# EAGLE board SparkFun RTK Express-Panel (EAGLE 9.6.2), part 1 of 3
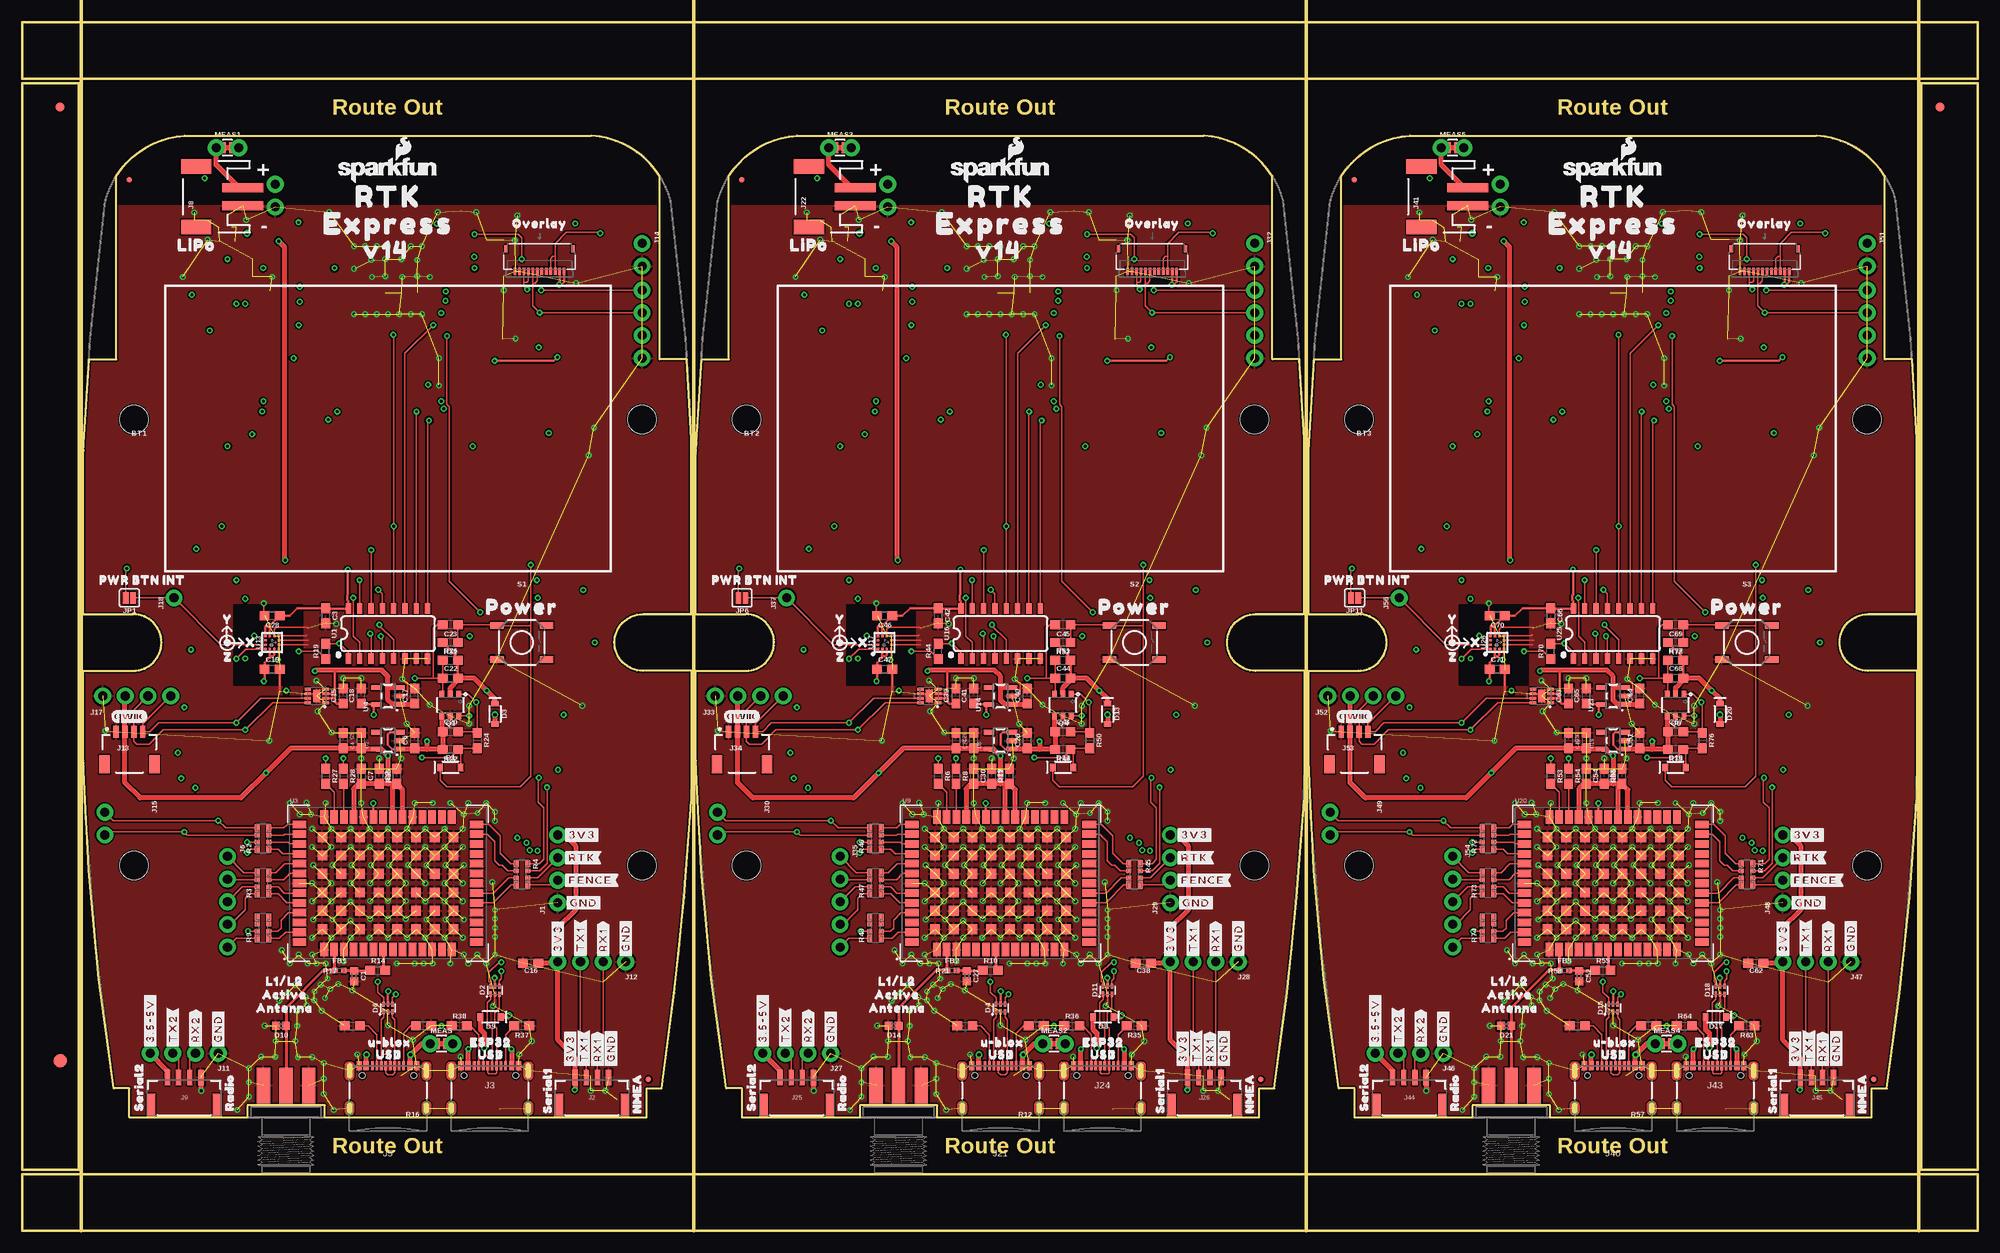
[diagram p0: board, top side]
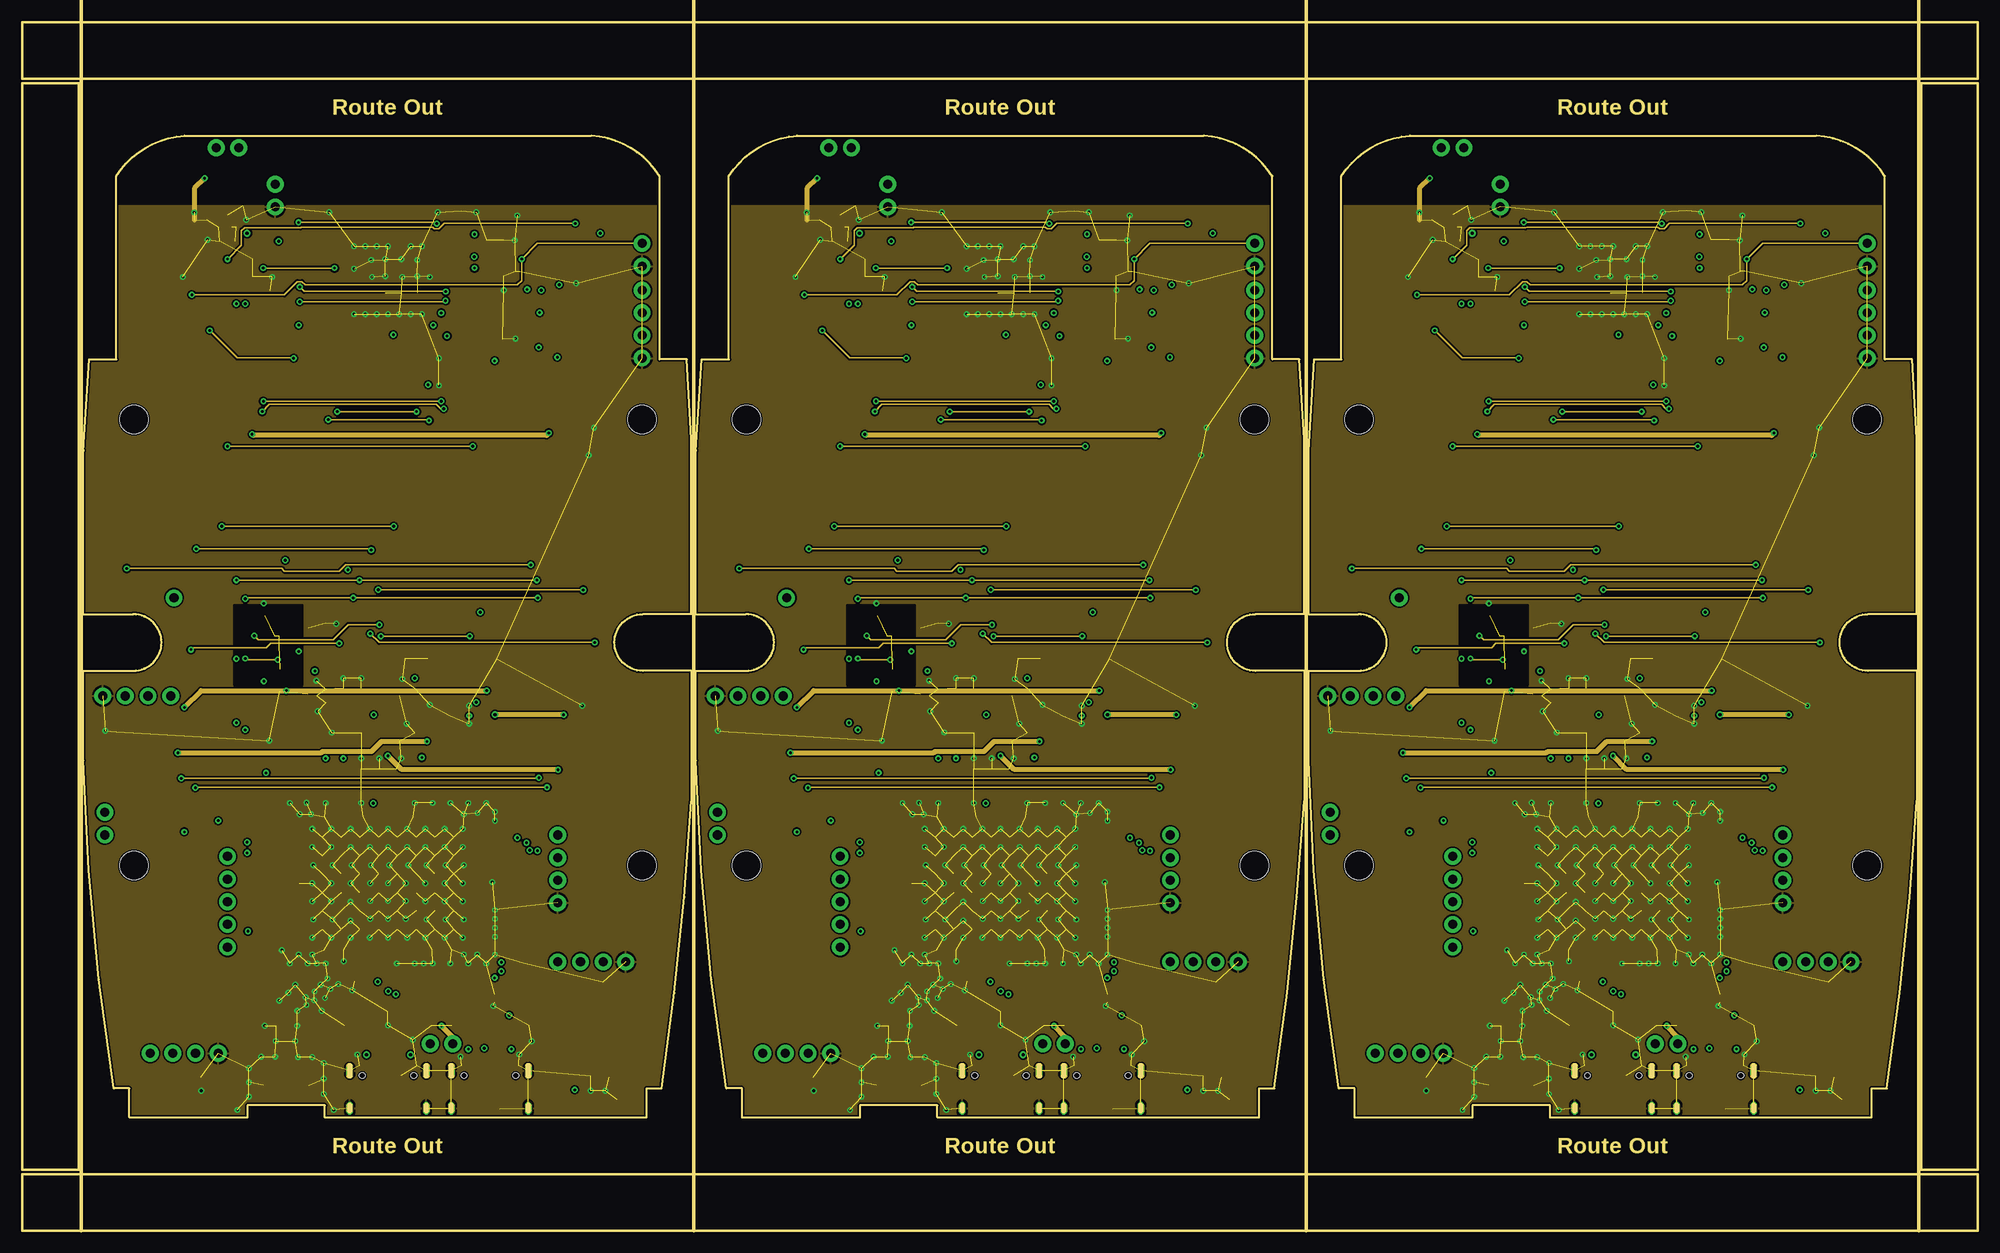
[diagram p1: board, inner layer Route2]
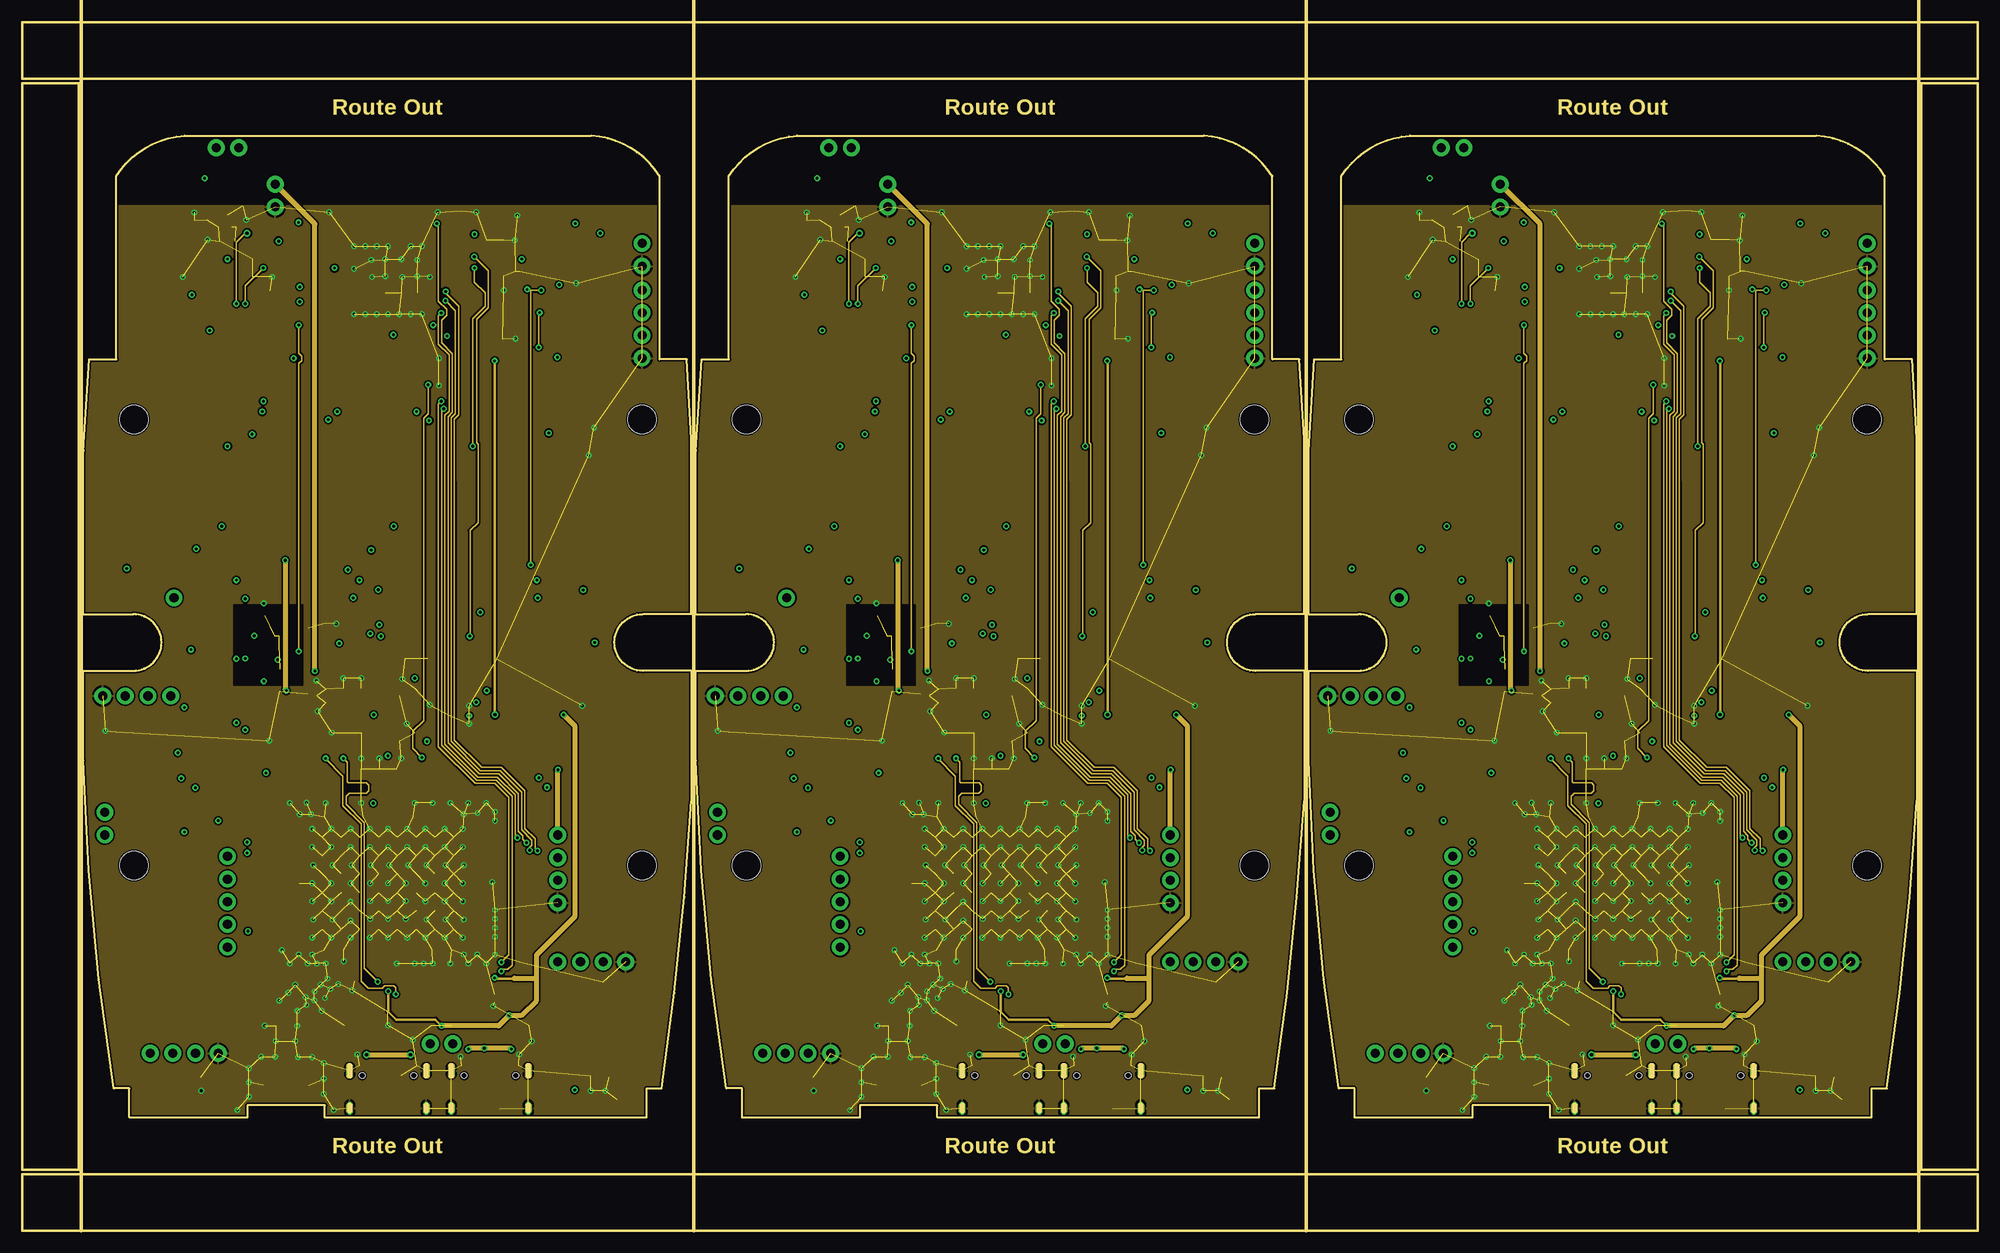
[diagram p2: board, inner layer Route15]
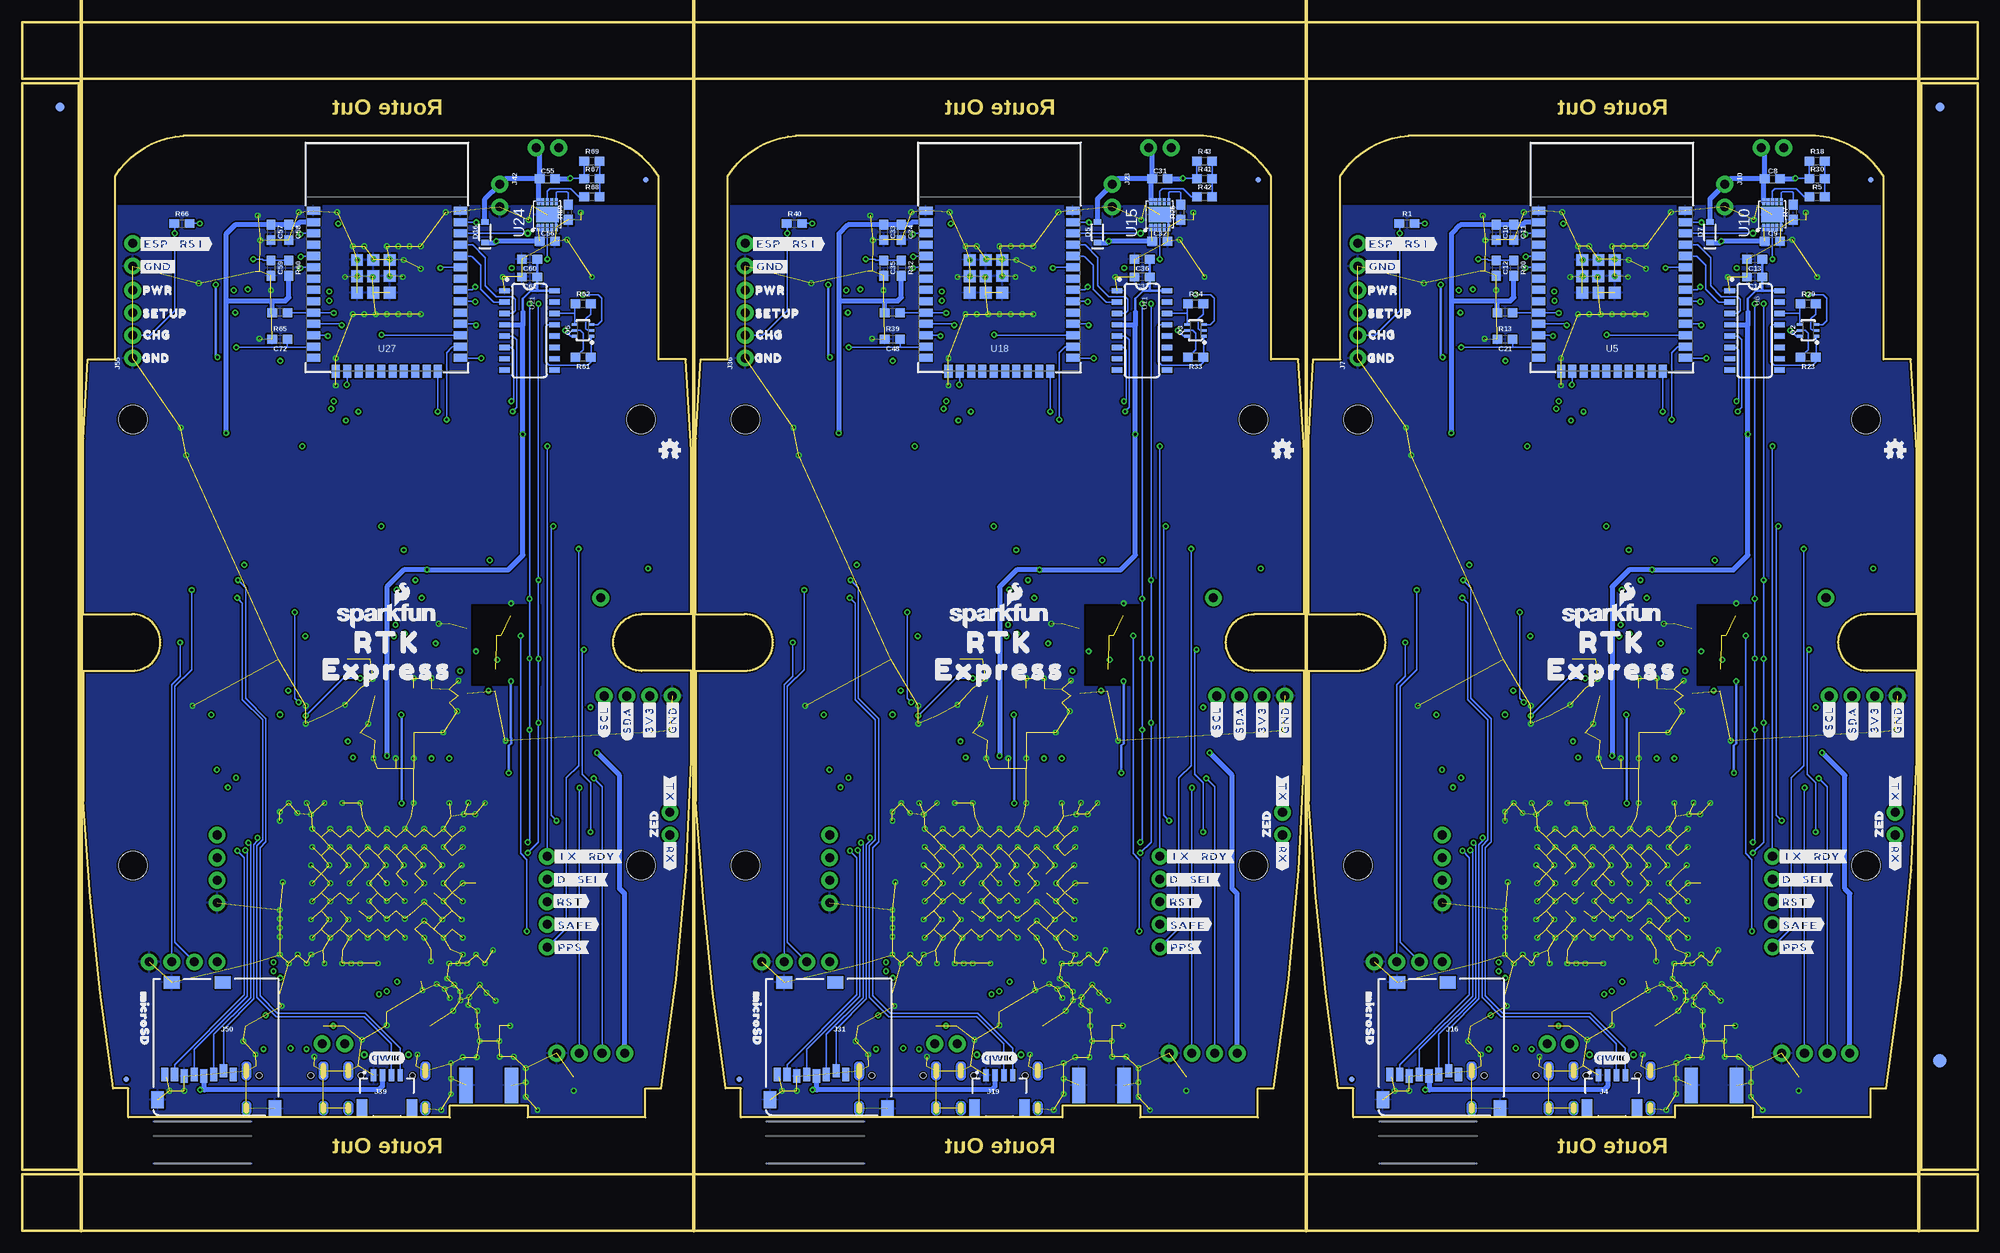
[diagram p3: board, bottom side, seen from below]

Size 219.33 x 135.54 mm. Coordinates in mm from the lower left corner, seen from the top.
Outline: 6.86,87.44 6.86,69.15 12.45,69.15 arc-180 12.45,62.8 6.86,62.8 6.86,52.77 arc8 10.27,15.97 12.02,15.97 12.02,12.7 25.24,12.7 25.24,14.06 33.94,14.06 33.94,12.7 70.02,12.7 70.02,15.97 71.72,15.97 arc5 75.06,48.19 75.06,62.8 69.59,62.8 arc-180 69.59,69.15 75.06,69.15 75.06,88.83 74.55,97.72 71.5,97.72 71.5,118.3 arc52 63.83,122.84 18.21,122.84 arc52 10.54,118.3 10.54,97.72 7.49,97.72 6.86,87.44
Outline: 6.86,87.44 6.86,87.56
Outline: 75.56,87.44 75.56,69.15 81.15,69.15 arc-180 81.15,62.8 75.56,62.8 75.56,52.77 arc8 78.98,15.97 80.73,15.97 80.73,12.7 93.95,12.7 93.95,14.06 102.65,14.06 102.65,12.7 138.73,12.7 138.73,15.97 140.43,15.97 arc5 143.76,48.19 143.76,62.8 138.3,62.8 arc-180 138.3,69.15 143.76,69.15 143.76,88.83 143.25,97.72 140.21,97.72 140.21,118.3 arc52 132.54,122.84 86.92,122.84 arc52 79.25,118.3 79.25,97.72 76.2,97.72 75.56,87.44
Outline: 75.56,87.44 75.56,87.56
Outline: 144.27,87.44 144.27,69.15 149.86,69.15 arc-180 149.86,62.8 144.27,62.8 144.27,52.77 arc8 147.68,15.97 149.43,15.97 149.43,12.7 162.66,12.7 162.66,14.06 171.36,14.06 171.36,12.7 207.43,12.7 207.43,15.97 209.13,15.97 arc5 212.47,48.19 212.47,62.8 207.01,62.8 arc-180 207.01,69.15 212.47,69.15 212.47,88.83 211.96,97.72 208.91,97.72 208.91,118.3 arc52 201.24,122.84 155.62,122.84 arc52 147.95,118.3 147.95,97.72 144.91,97.72 144.27,87.44
Outline: 144.27,87.44 144.27,87.56
Outline: 0,6.35 219.33,6.35 219.33,0 0,0 0,6.35
Outline: 212.98,128.68 219.33,128.68 219.33,6.86 212.98,6.86 212.98,128.68
Outline: 0,135.54 219.33,135.54 219.33,129.19 0,129.19 0,135.54
Outline: 0,128.68 6.35,128.68 6.35,6.86 0,6.86 0,128.68
Copper layers (1*2*15*16): Top 0.035559375mm / dielectric 0.47751875mm / Route2 0.035559375mm / dielectric 0.47751875mm / Route15 0.035559375mm / dielectric 0.47751875mm / Bottom 0.035559375mm
Design rules "SparkFun RTK Express": minimum track width 7mil, minimum drill 12mil, track to track 7mil, track to pad 7mil, pad to pad 7mil, via to via 7mil, smd to smd 7mil, copper to edge 7mil, drill to drill 7mil, minimum pad ring 7mil, minimum via ring 7mil, stop-mask expansion 4mil, vias tented up to drill 25mil, thermal gap 10mil
Net classes: 1 power: width 0.305 mm; 3 RF: width 0.35 mm, clearance 0.203 mm
Milling: 4 lines

## Footprints (pad centres in the part's own frame; a part is rotated, then mirrored left to right if it is on the bottom)
0402 = smd 0.85 x 0.9: 1 -0.58,0; 2 0.58,0
0603 = smd 1.1 x 1: 1 -0.85,0; 2 0.85,0
SOD-323 = smd 0.63 x 0.83: A 1.15,0; C -1.15,0
SOT886 = smd 0.61 x 0.25: 1 -0.405,0.5 | smd 0.56 x 0.25: 2 -0.43,0; 3 -0.43,-0.5; 4 0.43,-0.5; 5 0.43,0; 6 0.43,0.5
SMA-EDGE = smd 1.5 x 4: GND@0 -2.54,0; GND@1 2.54,0; SIG 0,0 | smd 1.5 x 4 bottom: GND@2 -2.54,0; GND@3 2.54,0
FIDUCIAL-1X2 = smd 1 x 1: 1 0,0
FIDUCIAL-1.5X3 = smd 1.5 x 1.5: 1 0,0
0402-TIGHT = smd 0.6 x 0.6: 1 -0.5,0; 2 0.5,0
1X04_NO_SILK = drill 1.016 pad 1.88: 1 0,0; 2 2.54,0; 3 5.08,0; 4 7.62,0
JST-4-SMD-1.25MM-LOCKING = smd 0.6 x 1.7: 1 -1.875,3.3; 2 -0.625,3.3; 3 0.625,3.3; 4 1.875,3.3 | smd 1 x 2.7: NC1 3.725,0.1; NC2 -3.725,0.1
USB-C-16P_4LAYER-PADS = smd 0.3 x 1: A5 -1.25,-0.34; A6 -0.25,-0.34; A7 0.25,-0.34; A8 1.25,-0.34; B5 1.75,-0.34; B6 0.75,-0.34; B7 -0.75,-0.34; B8 -1.75,-0.34 | smd 0.6 x 1: GND -3.225,-0.34; GND2 3.225,-0.34; VBUS1 -2.45,-0.34; VBUS2 2.45,-0.34 | drill 0.4 pad 0.6 long: SHLD1 -4.318,-0.915; SHLD2 4.318,-0.915; SHLD3 -4.318,-5.095; SHLD4 4.318,-5.095 | hole 0.65: -2.89,-1.445; 2.89,-1.445
JST04_1MM_RA = smd 0.6 x 1.35: 1 -1.5,0; 2 -0.5,0; 3 0.5,0; 4 1.5,0 | smd 1.2 x 2: NC1 2.8,-3.675; NC2 -2.8,-3.675
1X05_NO_SILK = drill 1.016 pad 1.88: 1 0,0; 2 2.54,0; 3 5.08,0; 4 7.62,0; 5 10.16,0
JST-2-SMD = smd 1 x 4.6: 1 -1,-3.7; 2 1,-3.7 | smd 1.6 x 3.4: NC1 -3.4,1.5; NC2 3.4,1.5
1X02_NO_SILK = drill 1.016 pad 1.88: 1 0,0; 2 2.54,0
MICRO-SD-SOCKET = smd 1.8 x 1.4: CD1 -2.05,0.4; CD2 -7.75,0.4 | smd 0.8 x 1.5: CS/DAT3 -7.84,10.3; DAT1 -1.24,10.7; DAT2 -8.94,10.7; DI/CMD -6.74,10.7; DO/DAT0 -2.34,10.7; GND -3.44,10.9; SCLK -4.54,10.7; VCC -5.64,10.9 | smd 1.4 x 1.9: GND1 -13.6,14.55; GND3 -0.45,13.55
1X01_NO_SILK = drill 1.016 pad 1.88: 1 0,0
FPC_12_DOUBLESIDED_BACKFLIP = smd 0.3 x 0.8: 1 -2.75,1.35; 2 -2.25,1.35; 3 -1.75,1.35; 4 -1.25,1.35; 5 -0.75,1.35; 6 -0.25,1.35; 7 0.25,1.35; 8 0.75,1.35; 9 1.25,1.35; 10 1.75,1.35; 11 2.25,1.35; 12 2.75,1.35 | smd 0.4 x 0.8: MP1 -3.75,-1.15; MP2 3.75,-1.15
SMT-JUMPER_2_NO_SILK = smd 0.635 x 1.27: 1 -0.406,0; 2 0.406,0
FIDUCIAL-MICRO = smd 0.635 x 0.635: 1 0,0
COMBO-JUMPER_2_NC_TRACE = smd 0.635 x 1.27: 1 -0.508,0; 2 0.508,0 | drill 1.016 pad 1.88: 3 -1.27,0; 4 1.27,0
SOT26 = smd 0.55 x 0.8: D1 -0.95,1.2; D2 0.95,1.2; G1 -0.95,-1.2; G2 0.95,-1.2; S1 0,1.2; S2 0,-1.2
SC70-6 = smd 0.3 x 0.66: 1 -0.65,-0.92; 2 0,-0.92; 3 0.65,-0.92; 4 0.65,0.92; 5 0,0.92; 6 -0.65,0.92
1206_RA = smd 0.8 x 0.55: P1 -1.2,-0.62; P4 1.2,-0.62; P5 1.2,0.68; P8 -1.2,0.68 | smd 0.5 x 0.55: P2 -0.4,-0.62; P3 0.4,-0.62; P6 0.4,0.68; P7 -0.4,0.68
TACTILE_SWITCH_SMD_5.2MM = smd 1.524 x 0.762: 1 -2.794,1.905; 2 2.794,1.905; 3 -2.794,-1.905; 4 2.794,-1.905
SO16 = smd 0.6 x 1.2: 1 -4.445,-2.8; 2 -3.175,-2.8; 3 -1.905,-2.8; 4 -0.635,-2.8; 5 0.635,-2.8; 6 1.905,-2.8; 7 3.175,-2.8; 8 4.445,-2.8; 9 4.445,2.8; 10 3.175,2.8; 11 1.905,2.8; 12 0.635,2.8; 13 -0.635,2.8; 14 -1.905,2.8; 15 -3.175,2.8; 16 -4.445,2.8
SOT23-5 = smd 0.55 x 1.2: 1 -0.95,-1.3; 2 0,-1.3; 3 0.95,-1.3; 4 0.95,1.3; 5 -0.95,1.3
ZED-F9P = smd 0.85 x 1.52: 1 -7.15,-7.45; 2 -6.05,-7.45; 3 -4.95,-7.45; 4 -3.85,-7.45; 5 -2.75,-7.45; 6 -1.65,-7.45; 7 -0.55,-7.45; 8 0.55,-7.45; 9 1.65,-7.45; 10 2.75,-7.45; 11 3.85,-7.45; 12 4.95,-7.45; 13 6.05,-7.45; 14 7.15,-7.45; 28 7.15,7.45; 29 6.05,7.45; 30 4.95,7.45; 31 3.85,7.45; 32 2.75,7.45; 33 1.65,7.45; 34 0.55,7.45; 35 -0.55,7.45; 36 -1.65,7.45; 37 -2.75,7.45; 38 -3.85,7.45; 39 -4.95,7.45; 40 -6.05,7.45; 41 -7.15,7.45 | smd 1.52 x 0.85: 15 9.95,-6.6; 16 9.95,-5.5; 17 9.95,-4.4; 18 9.95,-3.3; 19 9.95,-2.2; 20 9.95,-1.1; 21 9.95,0; 22 9.95,1.1; 23 9.95,2.2; 24 9.95,3.3; 25 9.95,4.4; 26 9.95,5.5; 27 9.95,6.6; 42 -9.95,6.6; 43 -9.95,5.5; 44 -9.95,4.4; 45 -9.95,3.3; 46 -9.95,2.2; 47 -9.95,1.1; 48 -9.95,0; 49 -9.95,-1.1; 50 -9.95,-2.2; 51 -9.95,-3.3; 52 -9.95,-4.4; 53 -9.95,-5.5; 54 -9.95,-6.6 | smd 1.1 x 1.1: 55 -1.05,-1.05; 56 -3.15,-1.05; 57 -5.25,-1.05; 58 -7.35,-1.05; 59 -1.05,-3.1; 60 -3.15,-3.1; 61 -5.25,-3.1; 62 -7.35,-3.1; 63 -1.05,-5.15; 64 -3.15,-5.15; 65 -5.25,-5.15; 66 -7.35,-5.15; 67 -1.05,5.15; 68 -3.15,5.15; 69 -5.25,5.15; 70 -7.35,5.15; 71 -1.05,3.1; 72 -3.15,3.1; 73 -5.25,3.1; 74 -7.35,3.1; 75 -1.05,1.05; 76 -3.15,1.05; 77 -5.25,1.05; 78 -7.35,1.05; 79 1.05,1.05; 80 3.15,1.05; 81 5.25,1.05; 82 7.35,1.05; 83 1.05,3.1; 84 3.15,3.1; 85 5.25,3.1; 86 7.35,3.1; 87 1.05,5.15; 88 3.15,5.15; 89 5.25,5.15; 90 7.35,5.15; 91 1.05,-5.15; 92 3.15,-5.15; 93 5.25,-5.15; 94 7.35,-5.15; 95 1.05,-3.1; 96 3.15,-3.1; 97 5.25,-3.1; 98 7.35,-3.1; 99 1.05,-1.05; 100 3.15,-1.05; 101 5.25,-1.05; 102 7.35,-1.05
ESP-WROOM-32D-NARROW = smd 0.9 x 1.5: 1 6.43,8.238; 2 5.16,8.238; 3 3.89,8.238; 4 2.62,8.238; 5 1.35,8.238; 6 0.08,8.238; 7 -1.19,8.238; 8 -2.46,8.238; 9 -3.73,8.238; 10 -5,8.238; 11 -6.27,8.238; 12 -7.54,8.238; 13 -8.81,8.238; 14 -10.08,8.238; 25 -10.08,-8.238; 26 -8.81,-8.238; 27 -7.54,-8.238; 28 -6.27,-8.238; 29 -5,-8.238; 30 -3.73,-8.238; 31 -2.46,-8.238; 32 -1.19,-8.238; 33 0.08,-8.238; 34 1.35,-8.238; 35 2.62,-8.238; 36 3.89,-8.238; 37 5.16,-8.238; 38 6.43,-8.238 | smd 1.5 x 0.9: 15 -11.57,5.715; 16 -11.57,4.445; 17 -11.57,3.175; 18 -11.57,1.905; 19 -11.57,0.635; 20 -11.57,-0.635; 21 -11.57,-1.905; 22 -11.57,-3.175; 23 -11.57,-4.445; 24 -11.57,-5.715 | smd 1.33 x 1.33: GND1 -0.912,1.531; GNDT1 -2.751,3.346; GNDT2 -2.761,1.516; GNDT3 -2.751,-0.314; GNDT4 -0.891,-0.324; GNDT5 0.909,-0.314; GNDT6 0.909,1.516; GNDT7 0.909,3.346; GNDT8 -0.921,3.346
SO016 = smd 0.6 x 1.2: 1 -4.445,-2.8; 2 -3.175,-2.8; 3 -1.905,-2.8; 4 -0.635,-2.8; 5 0.635,-2.8; 6 1.905,-2.8; 7 3.175,-2.8; 8 4.445,-2.8; 9 4.445,2.8; 10 3.175,2.8; 11 1.905,2.8; 12 0.635,2.8; 13 -0.635,2.8; 14 -1.905,2.8; 15 -3.175,2.8; 16 -4.445,2.8
DFN-8 = smd 0.3 x 0.7: 1 -0.75,-0.99; 2 -0.25,-0.99; 3 0.25,-0.99; 4 0.75,-0.99; 5 0.75,0.99; 6 0.25,0.99; 7 -0.25,0.99; 8 -0.75,0.99 | smd 1.38 x 0.8: 9 0,0
DFN-10 = smd 0.8 x 0.35: 1 -1.45,1; 2 -1.45,0.5; 3 -1.45,0; 4 -1.45,-0.5; 5 -1.45,-1; 6 1.45,-1; 7 1.45,-0.5; 8 1.45,0; 9 1.45,0.5; 10 1.45,1 | smd 1.7 x 2.5: 11 0,0
LGA-12-LISDH12 = smd 0.275 x 0.25: 1 -0.75,0.75; 2 -0.75,0.25; 3 -0.75,-0.25; 4 -0.75,-0.75; 7 0.75,-0.75; 8 0.75,-0.25; 9 0.75,0.25; 10 0.75,0.75 | smd 0.25 x 0.275: 5 -0.25,-0.75; 6 0.25,-0.75; 11 0.25,0.75; 12 -0.25,0.75
1553DBK-ENCLOSURE = hole 3.2: -25.006,28.499; 25.006,28.499; 25.006,-28.499; -25.006,-28.499

## Placement (x,y rotation side)
BT1  LIPO-OUTLINE1000  [LIPO-1000]  41.02,89.97 90 top
BT2  LIPO-OUTLINE1000  [LIPO-1000]  109.73,89.97 90 top
BT3  LIPO-OUTLINE1000  [LIPO-1000]  178.43,89.97 90 top
C1  47pF  [0402]  37.21,28.56 270 top
C2  1.0uF  [0603]  42.02,50.97 90 top
C3  0.1uF  [0603]  34.02,68.97 270 top
C4  1.0uF  [0603]  38.02,54.97 90 top
C5  0.1uF  [0603]  36.02,54.97 270 top
C6  1.0uF  [0603]  44.02,54.97 90 top
C7  0.1uF  [0603]  38.02,50.97 270 top
C8  4.7uF  [0603]  23.02,117.97 0 bottom
C9  4.7uF  [0603]  23.02,110.97 0 bottom
C10  10uF  [0603]  54.02,111.97 270 bottom
C11  0.1uF  [0603]  52.02,111.97 270 bottom
C12  0.1uF  [0603]  54.02,107.97 270 bottom
C13  0.1uF  [0603]  25.02,108.97 180 bottom
C14  10uF  [0603]  25.02,106.97 180 bottom
C15  0.1uF  [0603]  36.02,59.97 90 top
C16  0.1uF  [0603]  57.02,29.97 180 top
C17  1.0uF  [0603]  44.02,59.97 90 top
C18  1.0uF  [0603]  38.02,59.97 90 top
C19  10uF  [0603]  28.02,62.97 0 top
C20  10uF  [0603]  48.02,55.97 0 top
C21  0.1uF  [0603]  53.02,99.97 180 bottom
C22  0.1uF  [0603]  48.02,61.97 0 top
C23  0.1uF  [0603]  48.02,67.97 180 top
C24  1.0uF  [0603]  106.73,54.97 90 top
C25  0.1uF  [0603]  104.73,54.97 270 top
C26  1.0uF  [0603]  112.73,54.97 90 top
C27  47pF  [0402]  105.92,28.56 270 top
C28  0.1uF  [0603]  28.02,68.97 180 top
C29  1.0uF  [0603]  110.73,50.97 90 top
C30  0.1uF  [0603]  106.73,50.97 270 top
C31  4.7uF  [0603]  91.73,117.97 0 bottom
C32  4.7uF  [0603]  91.73,110.97 0 bottom
C33  10uF  [0603]  122.73,111.97 270 bottom
C34  0.1uF  [0603]  120.73,111.97 270 bottom
C35  0.1uF  [0603]  122.73,107.97 270 bottom
C36  0.1uF  [0603]  93.73,108.97 180 bottom
C37  10uF  [0603]  93.73,106.97 180 bottom
C38  0.1uF  [0603]  125.73,29.97 180 top
C39  0.1uF  [0603]  104.73,59.97 90 top
C40  1.0uF  [0603]  112.73,59.97 90 top
C41  1.0uF  [0603]  106.73,59.97 90 top
C42  0.1uF  [0603]  102.73,68.97 270 top
C43  10uF  [0603]  116.73,55.97 0 top
C44  0.1uF  [0603]  116.73,61.97 0 top
C45  0.1uF  [0603]  116.73,67.97 180 top
C46  0.1uF  [0603]  96.73,68.97 180 top
C47  10uF  [0603]  96.73,62.97 0 top
C48  0.1uF  [0603]  121.73,99.97 180 bottom
C49  1.0uF  [0603]  175.43,54.97 90 top
C50  0.1uF  [0603]  173.43,54.97 270 top
C51  1.0uF  [0603]  181.43,54.97 90 top
C52  47pF  [0402]  174.62,28.56 270 top
C53  1.0uF  [0603]  179.43,50.97 90 top
C54  0.1uF  [0603]  175.43,50.97 270 top
C55  4.7uF  [0603]  160.43,117.97 0 bottom
C56  4.7uF  [0603]  160.43,110.97 0 bottom
C57  10uF  [0603]  191.43,111.97 270 bottom
C58  0.1uF  [0603]  189.43,111.97 270 bottom
C59  0.1uF  [0603]  191.43,107.97 270 bottom
C60  0.1uF  [0603]  162.43,108.97 180 bottom
C61  10uF  [0603]  162.43,106.97 180 bottom
C62  0.1uF  [0603]  194.43,29.97 180 top
C63  0.1uF  [0603]  173.43,59.97 90 top
C64  1.0uF  [0603]  181.43,59.97 90 top
C65  1.0uF  [0603]  175.43,59.97 90 top
C66  0.1uF  [0603]  171.43,68.97 270 top
C67  10uF  [0603]  185.43,55.97 0 top
C68  0.1uF  [0603]  185.43,61.97 0 top
C69  0.1uF  [0603]  185.43,67.97 180 top
C70  0.1uF  [0603]  165.43,68.97 180 top
C71  10uF  [0603]  165.43,62.97 0 top
C72  0.1uF  [0603]  190.43,99.97 180 bottom
D1  250mA/100V  [SOD-323]  48.02,51.97 0 top
D2  PRTR5V0U2F  [SOT886]  53.02,26.97 90 top
D3  3A/10V/280mV  [SOD-323]  53.02,57.97 270 top
D4  PRTR5V0U2F  [SOT886]  109.73,24.97 90 top
D5  3A/10V/280mV  [SOD-323]  98.73,111.97 90 bottom
D6  PRTR5V0U2F  [SOT886]  41.02,24.97 90 top
D7  3A/10V/280mV  [SOD-323]  30.02,111.97 90 bottom
D8  3A/10V/280mV  [SOD-323]  121.23,23.97 180 top
D9  3A/10V/280mV  [SOD-323]  52.52,23.97 180 top
D10  PESD0402  [0402]  29.02,22.97 180 top
D11  PRTR5V0U2F  [SOT886]  121.73,26.97 90 top
D12  250mA/100V  [SOD-323]  116.73,51.97 0 top
D13  3A/10V/280mV  [SOD-323]  121.73,57.97 270 top
D14  PESD0402  [0402]  97.73,22.97 180 top
D15  PRTR5V0U2F  [SOT886]  178.43,24.97 90 top
D16  3A/10V/280mV  [SOD-323]  167.43,111.97 90 bottom
D17  3A/10V/280mV  [SOD-323]  189.93,23.97 180 top
D18  PRTR5V0U2F  [SOT886]  190.43,26.97 90 top
D19  250mA/100V  [SOD-323]  185.43,51.97 0 top
D20  3A/10V/280mV  [SOD-323]  190.43,57.97 270 top
D21  PESD0402  [0402]  166.43,22.97 180 top
E1  SMA  [SMA-EDGE]  29.59,16.3 180 top
E2  SMA  [SMA-EDGE]  98.3,16.3 180 top
E3  SMA  [SMA-EDGE]  167,16.3 180 top
E$1  [FIDUCIAL-1X2]  4.23,126.01 0 top
E$2  [FIDUCIAL-1X2]  4.23,126.01 0 bottom
E$3  [FIDUCIAL-1X2]  215.09,126.01 0 top
E$4  [FIDUCIAL-1X2]  215.09,126.01 0 bottom
E$5  [FIDUCIAL-1.5X3]  4.23,19.05 0 top
E$6  [FIDUCIAL-1.5X3]  4.23,19.05 0 bottom
FB1  2.66Ω  [0402-TIGHT]  35.56,29.2 0 top
FB2  2.66Ω  [0402-TIGHT]  104.27,29.2 0 top
FB3  2.66Ω  [0402-TIGHT]  172.97,29.2 0 top
J1  [1X04_NO_SILK]  60.07,36.76 90 top
J2  [JST-4-SMD-1.25MM-LOCKING]  63.88,13.89 0 top
J3  USB Female Type C Connector  [USB-C-16P_4LAYER-PADS]  52.45,18.84 0 top
J4  External  [JST04_1MM_RA]  41.02,17.44 0 bottom
J5  USB Female Type C Connector  [USB-C-16P_4LAYER-PADS]  41.02,18.84 0 top
J6  [1X05_NO_SILK]  23.02,41.97 270 top
J7  [1X04_NO_SILK]  69.52,97.87 90 bottom
J8  [JST-2-SMD]  21.02,115.97 90 top
J9  [JST-4-SMD-1.25MM-LOCKING]  18.16,13.89 0 top
J10  [1X02_NO_SILK]  28.37,117.37 270 bottom
J11  [1X04_NO_SILK]  21.97,19.89 180 top
J12  [1X04_NO_SILK]  67.69,30.14 180 top
J13  Internal  [JST04_1MM_RA]  12.02,55.97 0 top
J14  [1X02_NO_SILK]  69.52,110.73 270 top
J15  [1X02_NO_SILK]  9.27,46.92 270 top
J16  microSD  [MICRO-SD-SOCKET]  67.18,28.24 180 bottom
J17  Qwiic Right Angle  [1X04_NO_SILK]  9.02,59.97 0 top
J18  [1X01_NO_SILK]  17.02,70.97 90 top
J19  External  [JST04_1MM_RA]  109.73,17.44 0 bottom
J20  [FPC_12_DOUBLESIDED_BACKFLIP]  58.02,108.97 180 top
J21  USB Female Type C Connector  [USB-C-16P_4LAYER-PADS]  109.73,18.84 0 top
J22  [JST-2-SMD]  89.73,115.97 90 top
J23  [1X02_NO_SILK]  97.08,117.37 270 bottom
J24  USB Female Type C Connector  [USB-C-16P_4LAYER-PADS]  121.16,18.84 0 top
J25  [JST-4-SMD-1.25MM-LOCKING]  86.87,13.89 0 top
J26  [JST-4-SMD-1.25MM-LOCKING]  132.59,13.89 0 top
J27  [1X04_NO_SILK]  90.68,19.89 180 top
J28  [1X04_NO_SILK]  136.4,30.14 180 top
J29  [1X04_NO_SILK]  128.78,36.76 90 top
J30  [1X02_NO_SILK]  77.98,46.92 270 top
J31  microSD  [MICRO-SD-SOCKET]  135.89,28.24 180 bottom
J32  [1X02_NO_SILK]  138.23,110.73 270 top
J33  Qwiic Right Angle  [1X04_NO_SILK]  77.73,59.97 0 top
J34  Internal  [JST04_1MM_RA]  80.73,55.97 0 top
J35  [1X05_NO_SILK]  91.73,41.97 270 top
J36  [1X04_NO_SILK]  138.23,97.87 90 bottom
J37  [1X01_NO_SILK]  85.73,70.97 90 top
J38  [FPC_12_DOUBLESIDED_BACKFLIP]  126.73,108.97 180 top
J39  External  [JST04_1MM_RA]  178.43,17.44 0 bottom
J40  USB Female Type C Connector  [USB-C-16P_4LAYER-PADS]  178.43,18.84 0 top
J41  [JST-2-SMD]  158.43,115.97 90 top
J42  [1X02_NO_SILK]  165.79,117.37 270 bottom
J43  USB Female Type C Connector  [USB-C-16P_4LAYER-PADS]  189.86,18.84 0 top
J44  [JST-4-SMD-1.25MM-LOCKING]  155.57,13.89 0 top
J45  [JST-4-SMD-1.25MM-LOCKING]  201.29,13.89 0 top
J46  [1X04_NO_SILK]  159.38,19.89 180 top
J47  [1X04_NO_SILK]  205.1,30.14 180 top
J48  [1X04_NO_SILK]  197.48,36.76 90 top
J49  [1X02_NO_SILK]  146.68,46.92 270 top
J50  microSD  [MICRO-SD-SOCKET]  204.6,28.24 180 bottom
J51  [1X02_NO_SILK]  206.93,110.73 270 top
J52  Qwiic Right Angle  [1X04_NO_SILK]  146.43,59.97 0 top
J53  Internal  [JST04_1MM_RA]  149.43,55.97 0 top
J54  [1X05_NO_SILK]  160.43,41.97 270 top
J55  [1X04_NO_SILK]  206.93,97.87 90 bottom
J56  [1X01_NO_SILK]  154.43,70.97 90 top
J57  [FPC_12_DOUBLESIDED_BACKFLIP]  195.43,108.97 180 top
JP1  [SMT-JUMPER_2_NO_SILK]  12.02,70.97 180 top
JP2  FIDUCIALUFIDUCIAL  [FIDUCIAL-MICRO]  138.94,16.98 0 top
JP3  FIDUCIALUFIDUCIAL  [FIDUCIAL-MICRO]  80.7,117.86 0 top
JP4  FIDUCIALUFIDUCIAL  [FIDUCIAL-MICRO]  138.94,16.98 0 bottom
JP5  FIDUCIALUFIDUCIAL  [FIDUCIAL-MICRO]  80.7,117.86 0 bottom
JP6  [SMT-JUMPER_2_NO_SILK]  80.73,70.97 180 top
JP7  FIDUCIALUFIDUCIAL  [FIDUCIAL-MICRO]  207.64,16.98 0 top
JP8  FIDUCIALUFIDUCIAL  [FIDUCIAL-MICRO]  149.4,117.86 0 top
JP9  FIDUCIALUFIDUCIAL  [FIDUCIAL-MICRO]  207.64,16.98 0 bottom
JP10  FIDUCIALUFIDUCIAL  [FIDUCIAL-MICRO]  149.4,117.86 0 bottom
JP11  [SMT-JUMPER_2_NO_SILK]  149.43,70.97 180 top
JP21  FIDUCIALUFIDUCIAL  [FIDUCIAL-MICRO]  70.23,16.98 0 top
JP61  FIDUCIALUFIDUCIAL  [FIDUCIAL-MICRO]  11.99,117.86 0 top
JP71  FIDUCIALUFIDUCIAL  [FIDUCIAL-MICRO]  70.23,16.98 0 bottom
JP81  FIDUCIALUFIDUCIAL  [FIDUCIAL-MICRO]  11.99,117.86 0 bottom
LOGO1  OSHW-LOGOMINI  [OSHW-LOGO-MINI]  9.27,87.56 0 bottom
LOGO2  SFE_LOGO_NAME_FLAME.1_INCH  [SFE_LOGO_NAME_FLAME_.1]  41.02,68.97 0 bottom
LOGO3  SFE_LOGO_NAME_FLAME.1_INCH  [SFE_LOGO_NAME_FLAME_.1]  41.02,118.97 0 top
LOGO4  OSHW-LOGOMINI  [OSHW-LOGO-MINI]  77.98,87.56 0 bottom
LOGO5  SFE_LOGO_NAME_FLAME.1_INCH  [SFE_LOGO_NAME_FLAME_.1]  109.73,68.97 0 bottom
LOGO6  SFE_LOGO_NAME_FLAME.1_INCH  [SFE_LOGO_NAME_FLAME_.1]  109.73,118.97 0 top
LOGO7  OSHW-LOGOMINI  [OSHW-LOGO-MINI]  146.68,87.56 0 bottom
LOGO8  SFE_LOGO_NAME_FLAME.1_INCH  [SFE_LOGO_NAME_FLAME_.1]  178.43,68.97 0 bottom
LOGO9  SFE_LOGO_NAME_FLAME.1_INCH  [SFE_LOGO_NAME_FLAME_.1]  178.43,118.97 0 top
MEAS  [COMBO-JUMPER_2_NC_TRACE]  47.02,20.97 0 top
MEAS1  [COMBO-JUMPER_2_NC_TRACE]  23.02,121.47 0 top
MEAS2  [COMBO-JUMPER_2_NC_TRACE]  115.73,20.97 0 top
MEAS3  [COMBO-JUMPER_2_NC_TRACE]  91.73,121.47 0 top
MEAS4  [COMBO-JUMPER_2_NC_TRACE]  184.43,20.97 0 top
MEAS5  [COMBO-JUMPER_2_NC_TRACE]  160.43,121.47 0 top
Q1  SIL2308-TP  [SOT26]  48.02,58.97 180 top
Q2  MBT3904DW1T1  [SC70-6]  19.02,100.97 90 bottom
Q3  MBT3904DW1T1  [SC70-6]  87.73,100.97 90 bottom
Q4  SIL2308-TP  [SOT26]  116.73,58.97 180 top
Q5  MBT3904DW1T1  [SC70-6]  156.43,100.97 90 bottom
Q6  SIL2308-TP  [SOT26]  185.43,58.97 180 top
R1  470  [0603]  64.02,112.97 0 bottom
R2  33  [1206_RA]  27.02,43.97 90 top
R3  33  [1206_RA]  27.02,38.97 90 top
R4  33  [1206_RA]  56.02,39.97 270 top
R5  0  [0603]  18.02,115.97 0 bottom
R6  27  [0603]  102.73,50.97 270 top
R7  1k  [0603]  20.7,114.23 90 bottom
R8  27  [0603]  104.73,50.97 270 top
R9  33  [1206_RA]  27.02,33.97 90 top
R10  10  [0603]  108.58,29.2 0 top
R11  100k  [0603]  108.73,50.97 270 top
R12  5.1k  [0603]  113.73,22.97 180 top
R13  100k  [0603]  53.02,102.97 180 bottom
R14  10  [0603]  39.88,29.2 0 top
R15  100k  [0603]  40.02,50.97 270 top
R16  5.1k  [0603]  45.02,22.97 180 top
R17  5.1k  [0603]  37.02,22.97 0 top
R18  10k  [0603]  18.02,119.97 0 bottom
R19  1k  [0603]  34.02,64.97 90 top
R20  100k  [0603]  52.02,107.97 270 bottom
R21  5.1k  [0603]  105.73,22.97 0 top
R22  100k  [0603]  48.02,53.97 180 top
R23  10k  [0603]  19.02,97.97 180 bottom
R24  300k  [0603]  51.02,54.97 270 top
R25  1k  [0603]  89.41,114.23 90 bottom
R26  100k  [0603]  48.02,63.97 0 top
R27  27  [0603]  34.02,50.97 270 top
R28  27  [0603]  36.02,50.97 270 top
R29  10k  [0603]  19.02,103.97 0 bottom
R30  150k  [0603]  18.02,117.97 0 bottom
R31  10k  [0603]  48.02,65.97 180 top
R32  100k  [0603]  120.73,107.97 270 bottom
R33  10k  [0603]  87.73,97.97 180 bottom
R34  10k  [0603]  87.73,103.97 0 bottom
R35  5.1k  [0603]  124.73,22.97 180 top
R36  5.1k  [0603]  117.73,22.97 0 top
R37  5.1k  [0603]  56.02,22.97 180 top
R38  5.1k  [0603]  49.02,22.97 0 top
R39  100k  [0603]  121.73,102.97 180 bottom
R40  470  [0603]  132.73,112.97 0 bottom
R41  150k  [0603]  86.73,117.97 0 bottom
R42  0  [0603]  86.73,115.97 0 bottom
R43  10k  [0603]  86.73,119.97 0 bottom
R44  1k  [0603]  102.73,64.97 90 top
R45  33  [1206_RA]  124.73,39.97 270 top
R46  33  [1206_RA]  95.73,43.97 90 top
R47  33  [1206_RA]  95.73,38.97 90 top
R48  33  [1206_RA]  95.73,33.97 90 top
R49  100k  [0603]  116.73,53.97 180 top
R50  300k  [0603]  119.73,54.97 270 top
R51  100k  [0603]  116.73,63.97 0 top
R52  10k  [0603]  116.73,65.97 180 top
R53  27  [0603]  171.43,50.97 270 top
R54  27  [0603]  173.43,50.97 270 top
R55  10  [0603]  177.29,29.2 0 top
R56  100k  [0603]  177.43,50.97 270 top
R57  5.1k  [0603]  182.43,22.97 180 top
R58  5.1k  [0603]  174.43,22.97 0 top
R59  1k  [0603]  158.11,114.23 90 bottom
R60  100k  [0603]  189.43,107.97 270 bottom
R61  10k  [0603]  156.43,97.97 180 bottom
R62  10k  [0603]  156.43,103.97 0 bottom
R63  5.1k  [0603]  193.43,22.97 180 top
R64  5.1k  [0603]  186.43,22.97 0 top
R65  100k  [0603]  190.43,102.97 180 bottom
R66  470  [0603]  201.43,112.97 0 bottom
R67  150k  [0603]  155.43,117.97 0 bottom
R68  0  [0603]  155.43,115.97 0 bottom
R69  10k  [0603]  155.43,119.97 0 bottom
R70  1k  [0603]  171.43,64.97 90 top
R71  33  [1206_RA]  193.43,39.97 270 top
R72  33  [1206_RA]  164.43,43.97 90 top
R73  33  [1206_RA]  164.43,38.97 90 top
R74  33  [1206_RA]  164.43,33.97 90 top
R75  100k  [0603]  185.43,53.97 180 top
R76  300k  [0603]  188.43,54.97 270 top
R77  100k  [0603]  185.43,63.97 0 top
R78  10k  [0603]  185.43,65.97 180 top
S1  Power  [TACTILE_SWITCH_SMD_5.2MM]  56.02,65.97 0 top
S2  Power  [TACTILE_SWITCH_SMD_5.2MM]  124.73,65.97 0 top
S3  Power  [TACTILE_SWITCH_SMD_5.2MM]  193.43,65.97 0 top
U1  74HC4052D  [SO16]  41.02,66.97 0 top
U2  AP2112K-3.3  [SOT23-5]  41.02,54.97 90 top
U3  U-BLOX_ZED-F9P  [ZED-F9P]  41.02,38.97 0 top
U4  STLQ015-3.3V  [SOT23-5]  41.02,59.97 90 top
U5  ESP-WROOM-3232D-NARROW  [ESP-WROOM-32D-NARROW]  41.02,107.97 90 bottom
U6  CH340C  [SO016]  25.02,100.97 270 bottom
U7  MAX17048  [DFN-8]  33.02,59.97 90 top
U8  AP2112K-3.3  [SOT23-5]  109.73,54.97 90 top
U9  U-BLOX_ZED-F9P  [ZED-F9P]  109.73,38.97 0 top
U10  MCP73833  [DFN-10]  23.02,113.97 90 bottom
U11  CH340C  [SO016]  93.73,100.97 270 bottom
U12  MAX17048  [DFN-8]  101.73,59.97 90 top
U13  LIS2DH12  [LGA-12-LISDH12]  28.02,65.97 90 top
U14  STLQ015-3.3V  [SOT23-5]  109.73,59.97 90 top
U15  MCP73833  [DFN-10]  91.73,113.97 90 bottom
U16  74HC4052D  [SO16]  109.73,66.97 0 top
U17  LIS2DH12  [LGA-12-LISDH12]  96.73,65.97 90 top
U18  ESP-WROOM-3232D-NARROW  [ESP-WROOM-32D-NARROW]  109.73,107.97 90 bottom
U19  AP2112K-3.3  [SOT23-5]  178.43,54.97 90 top
U20  U-BLOX_ZED-F9P  [ZED-F9P]  178.43,38.97 0 top
U21  CH340C  [SO016]  162.43,100.97 270 bottom
U22  MAX17048  [DFN-8]  170.43,59.97 90 top
U23  STLQ015-3.3V  [SOT23-5]  178.43,59.97 90 top
U24  MCP73833  [DFN-10]  160.43,113.97 90 bottom
U25  74HC4052D  [SO16]  178.43,66.97 0 top
U26  LIS2DH12  [LGA-12-LISDH12]  165.43,65.97 90 top
U27  ESP-WROOM-3232D-NARROW  [ESP-WROOM-32D-NARROW]  178.43,107.97 90 bottom
U$1  [#GND#0]  60.7,36.76 0 top
U$2  [QWIIC_4MM]  109.73,19.35 0 bottom
U$3  [#TX_RDY#0]  18.62,41.97 0 bottom
U$4  [INT0]  17.02,72.97 0 top
U$5  [#3V3#0]  60.07,30.56 90 top
U$6  [L1#L20]  29.42,27.97 0 top
U$7  [RTK0]  41.02,65.97 0 bottom
U$8  [OVERLAY0]  58.02,112.97 0 top
U$9  [PWR_BTN1]  12.02,72.97 0 top
U$10  [#RTK#1]  60.58,41.84 0 top
U$11  [#PPS#0]  22.52,31.77 0 bottom
U$12  [V140]  40.82,110 0 top
U$13  [ACTIVE1]  29.42,26.47 0 top
U$14  [#RX#2]  9.27,43.88 270 bottom
U$15  [ANTENNA2]  29.42,24.97 0 top
U$16  [ZED0]  11.05,43.5 90 bottom
U$17  [##SAFE##5]  22.52,34.37 0 bottom
U$18  [#3V3#0]  129.28,44.38 0 top
U$19  [#GND#0]  129.41,36.76 0 top
U$20  [#RTK#1]  129.28,41.84 0 top
U$21  [1553DBK-ENCLOSURE]  109.73,65.97 90 top
U$22  [LIPO0]  88.26,110.55 0 top
U$23  [#3#5#5V#0]  14.35,20.4 90 top
U$24  [X0]  25.62,65.97 0 top
U$25  [U#BLOX0]  106.81,21.13 0 top
U$26  [1553DBK-ENCLOSURE]  41.02,65.97 90 top
U$27  [LIPO0]  19.56,110.55 0 top
U$28  [##RST##4]  22.62,36.97 0 bottom
U$29  [SERIAL10]  58.93,12.52 90 top
U$30  [QWIIC_4MM]  41.02,19.35 0 bottom
U$31  [POWER0]  56.02,69.97 0 top
U$32  [#FENCE#3]  60.58,39.3 0 top
U$33  [CHG2]  66.82,100.47 0 bottom
U$34  [GND3]  66.92,97.87 0 bottom
U$35  [U#BLOX0]  38.1,21.13 0 top
U$36  [USB1]  38.99,19.73 0 top
U$37  [#3V3#0]  60.58,44.38 0 top
U$38  [#GND#0]  21.97,20.4 90 top
U$39  [#RX2#2]  19.43,20.4 90 top
U$40  [#TX2#1]  16.89,20.4 90 top
U$41  [PWR0]  66.72,105.47 0 bottom
U$42  [SETUP1]  65.92,102.87 0 bottom
U$43  [SERIAL20]  13.08,12.78 90 top
U$44  [USB1]  107.69,19.73 0 top
U$45  [#RX1#2]  64.51,18.21 90 top
U$46  [#TX1#1]  62.99,18.21 90 top
U$47  [#3V3#0]  61.47,18.21 90 top
U$48  [#GND#0]  66.04,18.21 90 top
U$49  [NMEA1]  68.96,12.52 90 top
U$50  [RADIO0]  23.24,12.78 90 top
U$51  [EXPRESS0]  41.02,112.97 0 top
U$52  [SERIAL20]  81.79,12.78 90 top
U$53  [EXPRESS0]  41.02,62.97 0 bottom
U$54  [SERIAL10]  127.63,12.52 90 top
U$55  [Y1]  23.02,68.57 0 top
U$56  [Z2]  22.92,64.37 180 top
U$57  [#RX2#2]  88.14,20.4 90 top
U$58  [#TX2#1]  85.6,20.4 90 top
U$59  [#RX1#2]  133.22,18.21 90 top
U$60  [#ESP_RST#0]  68.96,110.68 0 bottom
U$61  [#TX1#1]  131.7,18.21 90 top
U$62  [#3V3#0]  130.17,18.21 90 top
U$63  [#GND#0]  134.75,18.21 90 top
U$64  [#GND#0]  90.68,20.4 90 top
U$65  [#TX1#1]  62.61,30.56 90 top
U$66  [USB1]  50.42,19.73 0 top
U$67  [ESP320]  49.53,21.13 0 top
U$68  [#RX1#2]  65.15,30.56 90 top
U$69  [NMEA1]  137.67,12.52 90 top
U$70  [#GND#2]  8.96,57.27 90 bottom
U$71  [RADIO0]  91.95,12.78 90 top
U$72  [#TX#1]  9.27,50.99 270 bottom
U$73  [##RST##4]  91.33,36.97 0 bottom
U$74  [RTK0]  41.02,115.97 0 top
U$75  [##SAFE##5]  91.23,34.37 0 bottom
U$76  [#FENCE#3]  129.28,39.3 0 top
U$77  [#3#5#5V#0]  83.06,20.4 90 top
U$78  [#PPS#0]  91.23,31.77 0 bottom
U$79  [#RX#2]  77.98,43.88 270 bottom
U$80  [ZED0]  79.75,43.5 90 bottom
U$81  [#TX#1]  77.98,50.99 270 bottom
U$82  [#GND#0]  67.69,30.56 90 top
U$83  [MICROSD0]  68.2,27.46 270 bottom
U$84  [#GND#1]  68.96,108.14 0 bottom
U$85  [#3V3#2]  11.56,57.27 90 bottom
U$86  [#SCL#1]  16.66,57.47 90 bottom
U$87  [#SDA#0]  14.06,57.27 90 bottom
U$88  [#D_SEL#0]  19.42,39.37 0 bottom
U$89  [USB1]  119.12,19.73 0 top
U$90  [ESP320]  118.24,21.13 0 top
U$91  [#3V3#0]  128.78,30.56 90 top
U$92  [#TX1#1]  131.32,30.56 90 top
U$93  [QWIIC_4MM]  12.02,57.67 0 top
U$94  [#RX1#2]  133.86,30.56 90 top
U$95  [#GND#0]  136.4,30.56 90 top
U$96  [MICROSD0]  136.9,27.46 270 bottom
U$97  [#GND#1]  137.67,108.14 0 bottom
U$98  [#ESP_RST#0]  137.67,110.68 0 bottom
U$99  [RTK0]  109.73,115.97 0 top
U$100  [RTK0]  109.73,65.97 0 bottom
U$101  [#GND#2]  77.67,57.27 90 bottom
U$102  [#3V3#2]  80.27,57.27 90 bottom
U$103  [#SCL#1]  85.37,57.47 90 bottom
U$104  [#SDA#0]  82.77,57.27 90 bottom
U$105  [#D_SEL#0]  88.13,39.37 0 bottom
U$106  [QWIIC_4MM]  80.73,57.67 0 top
U$107  [#TX_RDY#0]  87.33,41.97 0 bottom
U$108  [POWER0]  124.73,69.97 0 top
U$109  [CHG2]  135.53,100.47 0 bottom
U$110  [GND3]  135.63,97.87 0 bottom
U$111  [PWR0]  135.43,105.47 0 bottom
U$112  [SETUP1]  134.63,102.87 0 bottom
U$113  [EXPRESS0]  109.73,112.97 0 top
U$114  [EXPRESS0]  109.73,62.97 0 bottom
U$115  [X0]  94.33,65.97 0 top
U$116  [Y1]  91.73,68.57 0 top
U$117  [Z2]  91.63,64.37 180 top
U$118  [INT0]  85.73,72.97 0 top
U$119  [PWR_BTN1]  80.73,72.97 0 top
U$120  [OVERLAY0]  126.73,112.97 0 top
U$121  [L1#L20]  98.13,27.97 0 top
U$122  [ACTIVE1]  98.13,26.47 0 top
U$123  [ANTENNA2]  98.13,24.97 0 top
U$124  [V140]  109.52,110 0 top
U$125  [QWIIC_4MM]  178.43,19.35 0 bottom
U$126  [#3V3#0]  197.99,44.38 0 top
U$127  [#GND#0]  198.12,36.76 0 top
U$128  [#RTK#1]  197.99,41.84 0 top
U$129  [1553DBK-ENCLOSURE]  178.43,65.97 90 top
U$130  [LIPO0]  156.97,110.55 0 top
U$131  [U#BLOX0]  175.51,21.13 0 top
U$132  [USB1]  176.4,19.73 0 top
U$133  [SERIAL20]  150.49,12.78 90 top
U$134  [SERIAL10]  196.34,12.52 90 top
U$135  [#RX2#2]  156.84,20.4 90 top
U$136  [#TX2#1]  154.3,20.4 90 top
U$137  [#RX1#2]  201.93,18.21 90 top
U$138  [#TX1#1]  200.4,18.21 90 top
U$139  [#3V3#0]  198.88,18.21 90 top
U$140  [#GND#0]  203.45,18.21 90 top
U$141  [#GND#0]  159.38,20.4 90 top
U$142  [NMEA1]  206.37,12.52 90 top
U$143  [RADIO0]  160.65,12.78 90 top
U$144  [##RST##4]  160.03,36.97 0 bottom
U$145  [##SAFE##5]  159.93,34.37 0 bottom
U$146  [#FENCE#3]  197.99,39.3 0 top
U$147  [#3#5#5V#0]  151.76,20.4 90 top
U$148  [#PPS#0]  159.93,31.77 0 bottom
U$149  [#RX#2]  146.68,43.88 270 bottom
U$150  [ZED0]  148.46,43.5 90 bottom
U$151  [#TX#1]  146.68,50.99 270 bottom
U$152  [USB1]  187.83,19.73 0 top
U$153  [ESP320]  186.94,21.13 0 top
U$154  [#3V3#0]  197.48,30.56 90 top
U$155  [#TX1#1]  200.02,30.56 90 top
U$156  [#RX1#2]  202.56,30.56 90 top
U$157  [#GND#0]  205.1,30.56 90 top
U$158  [MICROSD0]  205.61,27.46 270 bottom
U$159  [#GND#1]  206.37,108.14 0 bottom
U$160  [#ESP_RST#0]  206.37,110.68 0 bottom
U$161  [RTK0]  178.43,115.97 0 top
U$162  [RTK0]  178.43,65.97 0 bottom
U$163  [#GND#2]  146.37,57.27 90 bottom
U$164  [#3V3#2]  148.97,57.27 90 bottom
U$165  [#SCL#1]  154.07,57.47 90 bottom
U$166  [#SDA#0]  151.47,57.27 90 bottom
U$167  [#D_SEL#0]  156.83,39.37 0 bottom
U$168  [QWIIC_4MM]  149.43,57.67 0 top
U$169  [#TX_RDY#0]  156.03,41.97 0 bottom
U$170  [POWER0]  193.43,69.97 0 top
U$171  [CHG2]  204.23,100.47 0 bottom
U$172  [GND3]  204.33,97.87 0 bottom
U$173  [PWR0]  204.13,105.47 0 bottom
U$174  [SETUP1]  203.33,102.87 0 bottom
U$175  [EXPRESS0]  178.43,112.97 0 top
U$176  [EXPRESS0]  178.43,62.97 0 bottom
U$177  [X0]  163.03,65.97 0 top
U$178  [Y1]  160.43,68.57 0 top
U$179  [Z2]  160.33,64.37 180 top
U$180  [INT0]  154.43,72.97 0 top
U$181  [PWR_BTN1]  149.43,72.97 0 top
U$182  [OVERLAY0]  195.43,112.97 0 top
U$183  [L1#L20]  166.83,27.97 0 top
U$184  [ACTIVE1]  166.83,26.47 0 top
U$185  [ANTENNA2]  166.83,24.97 0 top
U$186  [V140]  178.23,110 0 top

## Library data of the parts
BT1-BT3 = SparkFun-Batteries; PROD_ID: BATT-13243; SF_SKU: PRT-13813
C1 C27 C52 = SparkFun-Capacitors; PROD_ID: CAP-15063
C2 C4 C6 C17 C18 C24 C26 C29 C40 C41 C49 C51 C53 C64 C65 = SparkFun-Capacitors; PROD_ID: CAP-13930
C3 C11-C13 C15 C16 C21 C28 C34-C36 C38 C39 C42 C46 C48 C58-C60 C62 C63 C66 C70 C72 = SparkFun-Capacitors; PROD_ID: CAP-00810
C5 C7 C22 C23 C25 C30 C44 C45 C50 C54 C68 C69 = SparkFun-Capacitors; PROD_ID: CAP-08604
C8 C9 C31 C32 C55 C56 = SparkFun-Capacitors; PROD_ID: CAP-14106
C10 C14 C19 C20 C33 C37 C43 C47 C57 C61 C67 C71 = SparkFun-Capacitors; PROD_ID: CAP-11015
D1 D12 D19 = SparkFun-DiscreteSemi; PROD_ID: DIO-09646
D2 D4 D6 D11 D15 D18 = SparkFun-IC-Power; PROD_ID: DIO-14084
D3 D5 D7-D9 D13 D16 D17 D20 = SparkFun-DiscreteSemi; PROD_ID: DIO-14072
D10 D14 D21 = SparkFun-DiscreteSemi; DIGIKEY_PART: PESD0402-140CT-ND; MOUSE_PART: 650-PESD0402-140; PROD_ID: DIO-15359
E1-E3 = SparkFun-RF; PROD_ID: CONN-08289
E$1-E$4 JP2-JP5 JP7-JP10 JP21 JP61 JP71 JP81 LOGO1-LOGO9 U$2 U$30 U$93 U$106 U$125 U$168 = SparkFun-Aesthetics
E$5 E$6 = SparkFun-Retired
FB1-FB3 = SparkFun-Coils; PROD_ID: NDUC-15072
J1 J6 J7 J10-J12 J14 J15 J17 J18 J23 J27-J30 J32 J33 J35-J37 J42 J46-J49 J51 J52 J54-J56 = SparkFun-Connectors
J2 J9 J25 J26 J44 J45 = SparkFun-Connectors; PROD_ID: CONN-15303
J3 J5 J21 J24 J40 J43 = SparkFun-Connectors; PROD_ID: CONN-14122
J4 J19 J39 = SparkFun-Connectors; PROD_ID: CONN-13694; VALUE: Qwiic Right Angle
J8 J22 J41 = SparkFun-Connectors; PROD_ID: CONN-11443; SF_ID: PRT-08612
J13 J34 J53 = SparkFun-Connectors; PROD_ID: CONN-13694
J16 J31 J50 = SparkFun-Connectors; PROD_ID: CONN-07820
J20 J38 J57 = RTK Facet; PROD_ID: CONN-15766
JP1 JP6 JP11 MEAS MEAS1-MEAS5 = SparkFun-Jumpers
Q1 Q4 Q6 = SparkFun-DiscreteSemi; PROD_ID: TRANS-15717
Q2 Q3 Q5 = SparkFun-DiscreteSemi; PROD_ID: TRANS-13337
R1 R40 R66 = SparkFun-Resistors; PROD_ID: RES-07869
R2-R4 R9 R45-R48 R71-R74 = SparkFun-Resistors; PROD_ID: RES-15081
R5 R42 R68 = SparkFun-Resistors; PROD_ID: RES-08609
R6 R8 R27 R28 R53 R54 = SparkFun-Resistors; PROD_ID: RES-09334
R7 R19 R25 R44 R59 R70 = SparkFun-Resistors; PROD_ID: RES-07856
R10 R14 R55 = SparkFun-Resistors; PROD_ID: RES-12581
R11 R13 R15 R20 R22 R26 R32 R39 R49 R51 R56 R60 R65 R75 R77 = SparkFun-Resistors; PROD_ID: RES-07828
R12 R16 R17 R21 R35-R38 R57 R58 R63 R64 = SparkFun-Resistors; PROD_ID: RES-12083
R18 R43 R69 = SparkFun-Resistors; PROD_ID: RES-13608
R23 R29 R31 R33 R34 R52 R61 R62 R78 = SparkFun-Resistors; PROD_ID: RES-00824
R24 R50 R76 = SparkFun-Resistors; PROD_ID: RES-10809
R30 R41 R67 = SparkFun-Resistors; PROD_ID: RES-09117
S1-S3 = SparkFun-Switches; PROD_ID: SWCH-14139
U1 U16 U25 = SparkFun-IC-Logic; PROD_ID: IC-13103
U2 U8 U19 = SparkFun-IC-Power; PROD_ID: VREG-12457; VALUE: 3.3V
U3 U9 U20 = SparkFun-GPS; PROD_ID: IC-14209
U4 U14 U23 = SparkFun-IC-Power; PROD_ID: IC-15779
U5 U18 U27 = SparkFun-RF; PROD_ID: IC-15676
U6 U11 U21 = SparkFun-IC-Comms; PROD_ID: IC-14038
U7 U12 U22 = SparkFun-IC-Power; PROD_ID: IC-12551
U10 U15 U24 = SparkFun-IC-Power; PROD_ID: IC-14369
U13 U17 U26 = SparkFun-Sensors; DIGIKEY: 497-14851-2-ND; PROD_ID: IC-14229
U$1 U$3-U$20 U$22-U$25 U$27-U$29 U$31-U$92 U$94-U$105 U$107-U$124 U$126-U$128 U$130-U$167 U$169-U$186 = output
U$21 U$26 U$129 = SparkFun GPS RTK Surveyor

## Nets
3.3V [power]: C2.1 C3.1 C4.1 C5.2 C7.2 C10.1 C11.1 C13.1 C14.1 C16.1 C19.1 C28.1 J1.4 J2.1 J4.2 J12.4 J13.2 J16.VCC J17.2 R13.2 R15.2 R20.2 U1.16 U2.5 U3.33 U3.34 U3.38 U5.2 U6.4 U6.16 U13.2 U13.3 U13.9 U13.10
3.3V1 [power]: C24.1 C25.2 C29.1 C30.2 C33.1 C34.1 C36.1 C37.1 C38.1 C42.1 C46.1 C47.1 J19.2 J26.1 J28.4 J29.4 J31.VCC J33.2 J34.2 R11.2 R32.2 R39.2 U8.5 U9.33 U9.34 U9.38 U11.4 U11.16 U16.16 U17.2 U17.3 U17.9 U17.10 U18.2
3.3V2 [power]: C49.1 C50.2 C53.1 C54.2 C57.1 C58.1 C60.1 C61.1 C62.1 C66.1 C70.1 C71.1 J39.2 J45.1 J47.4 J48.4 J50.VCC J52.2 J53.2 R56.2 R60.2 R65.2 U19.5 U20.33 U20.34 U20.38 U21.4 U21.16 U25.16 U26.2 U26.3 U26.9 U26.10 U27.2
ANT_VCC: C1.1 FB1.2 R14.1
ANT_VCC1: C27.1 FB2.2 R10.1
ANT_VCC2: C52.1 FB3.2 R55.1
CC1: J5.A5 R17.2
CC2: J5.B5 R16.2
CC3: J3.B5 R37.2
CC4: J3.A5 R38.2
CC5: J21.A5 R21.2
CC6: J21.B5 R12.2
CC7: J24.B5 R35.2
CC8: J24.A5 R36.2
CC9: J40.A5 R58.2
CC10: J40.B5 R57.2
CC11: J43.B5 R63.2
CC12: J43.A5 R64.2
CHG_LED: R1.2 U10.3
CHG_LED1: R40.2 U15.3
CHG_LED2: R66.2 U24.3
CHG_LED_RES: J7.2 J20.3 J20.4 R1.1
CHG_LED_RES1: J36.2 J38.3 J38.4 R40.1
CHG_LED_RES2: J55.2 J57.3 J57.4 R66.1
CHG_THERM1: R5.2 R18.2 R30.2
CHG_THERM2: R41.2 R42.2 R43.2
CHG_THERM3: R67.2 R68.2 R69.2
D+: D6.4 R27.1
D+1: D2.4 U6.5
D+2: D4.4 R6.1
D+3: D11.4 U11.5
D+4: D15.4 R53.1
D+5: D18.4 U21.5
D-: D6.6 R28.1
D-1: D2.6 U6.6
D-2: D4.6 R8.1
D-3: D11.6 U11.6
D-4: D15.6 R54.1
D-5: D18.6 U21.6
ESP32_!DTR: Q2.1 R23.1 U6.13
ESP32_!DTR1: Q3.1 R33.1 U11.13
ESP32_!DTR2: Q5.1 R61.1 U21.13
ESP32_!RTS: Q2.4 R29.1 U6.14
ESP32_!RTS1: Q3.4 R34.1 U11.14
ESP32_!RTS2: Q5.4 R62.1 U21.14
ESP32_EN: C12.1 J14.1 Q2.3 R20.1 U5.3
ESP32_EN1: C35.1 J32.1 Q3.3 R32.1 U18.3
ESP32_EN2: C59.1 J51.1 Q5.3 R60.1 U27.3
ESP32_RXI: U5.34 U6.2
ESP32_RXI1: U11.2 U18.34
ESP32_RXI2: U21.2 U27.34
ESP32_TXO: U5.35 U6.3
ESP32_TXO1: U11.3 U18.35
ESP32_TXO2: U21.3 U27.35
ESP_0/BOOT: Q2.6 U5.25
ESP_0/BOOT1: Q3.6 U18.25
ESP_0/BOOT2: Q5.6 U27.25
ESP_1: U18.29
ESP_2: U18.14
ESP_2/MUX_A: U1.10 U5.24
ESP_2/MUX_A1: U16.10 U18.24
ESP_2/MUX_A2: U25.10 U27.24
ESP_3: U18.23
ESP_4: U18.9
ESP_4/ACCEL_INT: J18.1 JP1.1 U13.12
ESP_4/ACCEL_INT1: J37.1 JP6.1 U17.12
ESP_4/ACCEL_INT2: J56.1 JP11.1 U26.12
ESP_4/MUX_B: U1.9 U5.26
ESP_4/MUX_B1: U16.9 U18.26
ESP_4/MUX_B2: U25.9 U27.26
ESP_5: U5.29
ESP_6: U18.8
ESP_7: U27.29
ESP_8: U27.14
ESP_9: U27.23
ESP_10: U27.9
ESP_11: U27.8
ESP_12: U5.14
ESP_13/POWER_CTRL: D1.A R22.1 R24.2 U5.16
ESP_13/POWER_CTRL1: D12.A R49.1 R50.2 U18.16
ESP_13/POWER_CTRL2: D19.A R75.1 R76.2 U27.16
ESP_14/SETUP_BUTTON: C21.1 J7.3 J20.7 J20.8 U5.13
ESP_14/SETUP_BUTTON1: C48.1 J36.3 J38.7 J38.8 U18.13
ESP_14/SETUP_BUTTON2: C72.1 J55.3 J57.7 J57.8 U27.13
ESP_15: U5.23
ESP_18/SCK: J16.SCLK U5.30
ESP_18/SCK1: J31.SCLK U18.30
ESP_18/SCK2: J50.SCLK U27.30
ESP_19/CIPO: J16.DO/DAT0 U5.31
ESP_19/CIPO1: J31.DO/DAT0 U18.31
ESP_19/CIPO2: J50.DO/DAT0 U27.31
ESP_21/SDA: J4.3 J13.3 J17.3 R2.P7 U1.2 U5.33 U7.8 U13.4
ESP_21/SDA1: J19.3 J33.3 J34.3 R46.P7 U12.8 U16.2 U17.4 U18.33
ESP_21/SDA2: J39.3 J52.3 J53.3 R72.P7 U22.8 U25.2 U26.4 U27.33
ESP_22/SCL: J4.4 J13.4 J17.4 R2.P8 U1.15 U5.36 U7.7 U13.1
ESP_22/SCL1: J19.4 J33.4 J34.4 R46.P8 U12.7 U16.15 U17.1 U18.36
ESP_22/SCL2: J39.4 J52.4 J53.4 R72.P8 U22.7 U25.15 U26.1 U27.36
ESP_23/COPI: J16.DI/CMD U5.37
ESP_23/COPI1: J31.DI/CMD U18.37
ESP_23/COPI2: J50.DI/CMD U27.37
ESP_25/SD_!CS!: J16.CS/DAT3 R13.1 U5.10
ESP_25/SD_!CS!1: J31.CS/DAT3 R39.1 U18.10
ESP_25/SD_!CS!2: J50.CS/DAT3 R65.1 U27.10
ESP_26/DAC1: U16.11 U18.11
ESP_26/DAC2: U1.11 U5.11
ESP_26/DAC3: U25.11 U27.11
ESP_26/ZED_TX_READY_LV: R3.P4 U3.46
ESP_26/ZED_TX_READY_LV1: R47.P4 U9.46
ESP_26/ZED_TX_READY_LV2: R73.P4 U20.46
ESP_27/FAST_OFF: C20.2 Q1.G1 R24.1 U5.12
ESP_27/FAST_OFF1: C43.2 Q4.G1 R50.1 U18.12
ESP_27/FAST_OFF2: C67.2 Q6.G1 R76.1 U27.12
ESP_32: U5.8
ESP_33: U5.9
ESP_D1+: D2.3 J3.A6 J3.B6
ESP_D1+1: D11.3 J24.A6 J24.B6
ESP_D1+2: D18.3 J43.A6 J43.B6
ESP_D1-: D2.1 J3.A7 J3.B7
ESP_D1-1: D11.1 J24.A7 J24.B7
ESP_D1-2: D18.1 J43.A7 J43.B7
ESP_I1: U18.4
ESP_I2: U18.7
ESP_I3: U27.4
ESP_I4: U27.7
ESP_I16/ZED-TXO1: J15.1 R2.P5 U1.12 U5.27
ESP_I16/ZED-TXO2: J30.1 R46.P5 U16.12 U18.27
ESP_I16/ZED-TXO3: J49.1 R72.P5 U25.12 U27.27
ESP_I34/ZED_TX_READY: J6.1 R3.P5 U5.6
ESP_I34/ZED_TX_READY1: J35.1 R47.P5 U18.6
ESP_I34/ZED_TX_READY2: J54.1 R73.P5 U27.6
ESP_I35: U5.7
ESP_I36: U5.4
ESP_I39/ADC1: U16.4 U18.5
ESP_I39/ADC2: U25.4 U27.5
ESP_I39/ADC39: U1.4 U5.5
ESP_O17/ZED-RXI1: J15.2 R2.P6 R19.2 U1.1
ESP_O17/ZED-RXI2: J30.2 R44.2 R46.P6 U16.1
ESP_O17/ZED-RXI3: J49.2 R70.2 R72.P6 U25.1
EXTERNAL_DATA_IN: J2.3 J12.2 U1.3
EXTERNAL_DATA_IN1: J26.3 J28.2 U16.3
EXTERNAL_DATA_IN2: J45.3 J47.2 U25.3
EXTERNAL_DATA_OUT: J2.2 J12.3 U1.13
EXTERNAL_DATA_OUT1: J26.2 J28.3 U16.13
EXTERNAL_DATA_OUT2: J45.2 J47.3 U25.13
EXTINT_LV: R9.P2 U3.51
EXTINT_LV1: R48.P2 U9.51
EXTINT_LV2: R74.P2 U20.51
FENCE_LV: R4.P4 U3.19
FENCE_LV1: R45.P4 U9.19
FENCE_LV2: R71.P4 U20.19
GND: C1.2 C2.2 C3.2 C4.2 C5.1 C6.2 C7.1 C8.2 C9.2 C10.2 C11.2 C12.2 C13.2 C14.2 C15.2 C16.2 C17.2 C18.2 C19.2 C21.2 C28.2 D2.2 D6.2 D10.2 E1.GND@0 E1.GND@1 E1.GND@2 E1.GND@3 J1.1 J2.4 J3.GND J3.GND2 J3.SHLD1 J3.SHLD2 J3.SHLD3 J3.SHLD4 J4.1 J5.GND J5.GND2 J5.SHLD1 J5.SHLD2 J5.SHLD3 J5.SHLD4 J7.1 J8.1 J9.4 J10.2 J11.1 J12.1 J13.1 J14.2 J16.CD1 J16.GND J16.GND1 J16.GND3 J17.1 J20.11 J20.12 Q1.S1 R7.1 R15.1 R16.1 R17.1 R18.1 R30.1 R37.1 R38.1 S1.3 U1.6 U1.7 U1.8 U2.2 U3.1 U3.3 U3.12 U3.14 U3.32 U3.37 U3.41 U3.48 U3.55 U3.56 U3.57 U3.58 U3.59 U3.60 U3.61 U3.62 U3.63 U3.64 U3.65 U3.66 U3.67 U3.68 U3.69 U3.70 U3.71 U3.72 U3.73 U3.74 U3.75 U3.76 U3.77 U3.78 U3.79 U3.80 U3.81 U3.82 U3.83 U3.84 U3.85 U3.86 U3.87 U3.88 U3.89 U3.90 U3.91 U3.92 U3.93 U3.94 U3.95 U3.96 U3.97 U3.98 U3.99 U3.100 U3.101 U3.102 U4.2 U5.1 U5.15 U5.38 U5.GND1 U5.GNDT1 U5.GNDT2 U5.GNDT3 U5.GNDT4 U5.GNDT5 U5.GNDT6 U5.GNDT7 U5.GNDT8 U6.1 U7.1 U7.4 U7.6 U7.9 U10.5 U10.11 U13.5 U13.6 U13.7 U13.8
GND1: C24.2 C25.1 C26.2 C27.2 C29.2 C30.1 C31.2 C32.2 C33.2 C34.2 C35.2 C36.2 C37.2 C38.2 C39.2 C40.2 C41.2 C42.2 C46.2 C47.2 C48.2 D4.2 D11.2 D14.2 E2.GND@0 E2.GND@1 E2.GND@2 E2.GND@3 J19.1 J21.GND J21.GND2 J21.SHLD1 J21.SHLD2 J21.SHLD3 J21.SHLD4 J22.1 J23.2 J24.GND J24.GND2 J24.SHLD1 J24.SHLD2 J24.SHLD3 J24.SHLD4 J25.4 J26.4 J27.1 J28.1 J29.1 J31.CD1 J31.GND J31.GND1 J31.GND3 J32.2 J33.1 J34.1 J36.1 J38.11 J38.12 Q4.S1 R11.1 R12.1 R21.1 R25.1 R35.1 R36.1 R41.1 R43.1 S2.3 U8.2 U9.1 U9.3 U9.12 U9.14 U9.32 U9.37 U9.41 U9.48 U9.55 U9.56 U9.57 U9.58 U9.59 U9.60 U9.61 U9.62 U9.63 U9.64 U9.65 U9.66 U9.67 U9.68 U9.69 U9.70 U9.71 U9.72 U9.73 U9.74 U9.75 U9.76 U9.77 U9.78 U9.79 U9.80 U9.81 U9.82 U9.83 U9.84 U9.85 U9.86 U9.87 U9.88 U9.89 U9.90 U9.91 U9.92 U9.93 U9.94 U9.95 U9.96 U9.97 U9.98 U9.99 U9.100 U9.101 U9.102 U11.1 U12.1 U12.4 U12.6 U12.9 U14.2 U15.5 U15.11 U16.6 U16.7 U16.8 U17.5 U17.6 U17.7 U17.8 U18.1 U18.15 U18.38 U18.GND1 U18.GNDT1 U18.GNDT2 U18.GNDT3 U18.GNDT4 U18.GNDT5 U18.GNDT6 U18.GNDT7 U18.GNDT8
GND2: C49.2 C50.1 C51.2 C52.2 C53.2 C54.1 C55.2 C56.2 C57.2 C58.2 C59.2 C60.2 C61.2 C62.2 C63.2 C64.2 C65.2 C66.2 C70.2 C71.2 C72.2 D15.2 D18.2 D21.2 E3.GND@0 E3.GND@1 E3.GND@2 E3.GND@3 J39.1 J40.GND J40.GND2 J40.SHLD1 J40.SHLD2 J40.SHLD3 J40.SHLD4 J41.1 J42.2 J43.GND J43.GND2 J43.SHLD1 J43.SHLD2 J43.SHLD3 J43.SHLD4 J44.4 J45.4 J46.1 J47.1 J48.1 J50.CD1 J50.GND J50.GND1 J50.GND3 J51.2 J52.1 J53.1 J55.1 J57.11 J57.12 Q6.S1 R56.1 R57.1 R58.1 R59.1 R63.1 R64.1 R67.1 R69.1 S3.3 U19.2 U20.1 U20.3 U20.12 U20.14 U20.32 U20.37 U20.41 U20.48 U20.55 U20.56 U20.57 U20.58 U20.59 U20.60 U20.61 U20.62 U20.63 U20.64 U20.65 U20.66 U20.67 U20.68 U20.69 U20.70 U20.71 U20.72 U20.73 U20.74 U20.75 U20.76 U20.77 U20.78 U20.79 U20.80 U20.81 U20.82 U20.83 U20.84 U20.85 U20.86 U20.87 U20.88 U20.89 U20.90 U20.91 U20.92 U20.93 U20.94 U20.95 U20.96 U20.97 U20.98 U20.99 U20.100 U20.101 U20.102 U21.1 U22.1 U22.4 U22.6 U22.9 U23.2 U24.5 U24.11 U25.6 U25.7 U25.8 U26.5 U26.6 U26.7 U26.8 U27.1 U27.15 U27.38 U27.GND1 U27.GNDT1 U27.GNDT2 U27.GNDT3 U27.GNDT4 U27.GNDT5 U27.GNDT6 U27.GNDT7 U27.GNDT8
GPS_ANT1 [RF]: D10.1 E1.SIG FB1.1 U3.2
GPS_ANT2 [RF]: D14.1 E2.SIG FB2.1 U9.2
GPS_ANT3 [RF]: D21.1 E3.SIG FB3.1 U20.2
LIPO_RAW: J8.2 MEAS1.1 MEAS1.3
LIPO_RAW1: J22.2 MEAS3.1 MEAS3.3
LIPO_RAW2: J41.2 MEAS5.1 MEAS5.3
N$1: R6.2 U9.40
N$2: R8.2 U9.39
N$3: R10.2 U9.7
N$4 [power]: J5.VBUS1 J5.VBUS2 MEAS.1 MEAS.3
N$5: R5.1 U10.8
N$6: R19.1 U5.28
N$7: Q3.5 R33.2
N$8: Q3.2 R34.2
N$9 [power]: D8.A J24.VBUS1 J24.VBUS2
N$10 [power]: J21.VBUS1 J21.VBUS2 MEAS2.1 MEAS2.3
N$11: R27.2 U3.40
N$12: R28.2 U3.39
N$13: R14.2 U3.7
N$14: R42.1 U15.8
N$15: C22.1 C23.2 Q1.D1 Q1.G2 R26.1
N$16: R44.1 U18.28
N$17: C44.1 C45.2 Q4.D1 Q4.G2 R51.1
N$18: R53.2 U20.40
N$19: R54.2 U20.39
N$20: R55.2 U20.7
N$21: Q5.5 R61.2
N$22: Q5.2 R62.2
N$23 [power]: D17.A J43.VBUS1 J43.VBUS2
N$24: Q2.5 R23.2
N$25: Q2.2 R29.2
N$26 [power]: J40.VBUS1 J40.VBUS2 MEAS4.1 MEAS4.3
N$27: R68.1 U24.8
N$28: R70.1 U27.28
N$29: C68.1 C69.2 Q6.D1 Q6.G2 R77.1
N$32 [power]: D9.A J3.VBUS1 J3.VBUS2
POWER_BTN: C23.1 D1.C J7.4 J20.9 J20.10 JP1.2 R31.1 S1.1
POWER_BTN1: C45.1 D12.C J36.4 J38.9 J38.10 JP6.2 R52.1 S2.1
POWER_BTN2: C69.1 D19.C J55.4 J57.9 J57.10 JP11.2 R78.1 S3.1
PPS: R9.P1 U3.53
PPS1: R48.P1 U9.53
PPS2: R74.P1 U20.53
PROG1: R7.2 U10.6
PROG2: R25.2 U15.6
PROG3: R59.2 U24.6
RTK_LV: R4.P3 U3.20
RTK_LV1: R45.P3 U9.20
RTK_LV2: R71.P3 U20.20
RX2_LV: R4.P2 U3.26
RX2_LV1: R45.P2 U9.26
RX2_LV2: R71.P2 U20.26
RXLV: R2.P3 U3.43
RXLV1: R46.P3 U9.43
RXLV2: R72.P3 U20.43
SCL_LV: R2.P1 U3.45
SCL_LV1: R46.P1 U9.45
SCL_LV2: R72.P1 U20.45
SDA_LV: R2.P2 U3.44
SDA_LV1: R46.P2 U9.44
SDA_LV2: R72.P2 U20.44
TX2_LV: R4.P1 U3.27
TX2_LV1: R45.P1 U9.27
TX2_LV2: R71.P1 U20.27
TXLV: R2.P4 U3.42
TXLV1: R46.P4 U9.42
TXLV2: R72.P4 U20.42
UNP_D+: D6.3 J5.A6 J5.B6
UNP_D+1: D4.3 J21.A6 J21.B6
UNP_D+2: D15.3 J40.A6 J40.B6
UNP_D-: D6.1 J5.A7 J5.B7
UNP_D-1: D4.1 J21.A7 J21.B7
UNP_D-2: D15.1 J40.A7 J40.B7
V_BATT [power]: C8.1 C15.1 C17.1 D7.A J10.1 MEAS1.2 MEAS1.4 U4.1 U4.3 U7.2 U7.3 U10.9 U10.10
V_BATT1 [power]: C31.1 C39.1 C40.1 D5.A J23.1 MEAS3.2 MEAS3.4 U12.2 U12.3 U14.1 U14.3 U15.9 U15.10
V_BATT2 [power]: C55.1 C63.1 C64.1 D16.A J42.1 MEAS5.2 MEAS5.4 U22.2 U22.3 U23.1 U23.3 U24.9 U24.10
V_BKCP [power]: C18.1 U3.36 U4.5
V_BKCP1 [power]: C41.1 U9.36 U14.5
V_BKCP2 [power]: C65.1 U20.36 U23.5
V_RAW [power]: C9.1 C22.2 D3.C D7.C Q1.S2 R26.2 R31.2 U10.1 U10.2
V_RAW1 [power]: C32.1 C44.2 D5.C D13.C Q4.S2 R51.2 R52.2 U15.1 U15.2
V_RAW2 [power]: C56.1 C68.2 D16.C D20.C Q6.S2 R77.2 R78.2 U24.1 U24.2
V_USB [power]: D2.5 D3.A D6.5 D9.C J20.1 J20.2 MEAS.2 MEAS.4
V_USB1 [power]: D4.5 D8.C D11.5 D13.A J38.1 J38.2 MEAS2.2 MEAS2.4
V_USB2 [power]: D15.5 D17.C D18.5 D20.A J57.1 J57.2 MEAS4.2 MEAS4.4
VOUT: C6.1 C20.1 J9.1 J11.4 Q1.D2 R22.2 U2.1 U2.3
VOUT1: C26.1 C43.1 J25.1 J27.4 Q4.D2 R49.2 U8.1 U8.3
VOUT2: C51.1 C67.1 J44.1 J46.4 Q6.D2 R75.2 U19.1 U19.3
ZED-RXI1: J25.3 J27.2 R45.P7
ZED-RXI2: J9.3 J11.2 R4.P7
ZED-RXI3: J44.3 J46.2 R71.P7
ZED-TXO1: J25.2 J27.3 R45.P8
ZED-TXO2: J9.2 J11.3 R4.P8
ZED-TXO3: J44.2 J46.3 R71.P8
ZED_!RESET!: J6.3 R3.P7
ZED_!RESET!1: J35.3 R47.P7
ZED_!RESET!2: J54.3 R73.P7
ZED_!RESET!_LV: R3.P2 U3.49
ZED_!RESET!_LV1: R47.P2 U9.49
ZED_!RESET!_LV2: R73.P2 U20.49
ZED_!SAFE!: J6.4 R3.P8
ZED_!SAFE!1: J35.4 R47.P8
ZED_!SAFE!2: J54.4 R73.P8
ZED_!SAFE!_LV: R3.P1 U3.50
ZED_!SAFE!_LV1: R47.P1 U9.50
ZED_!SAFE!_LV2: R73.P1 U20.50
ZED_D_SEL: J6.2 R3.P6
ZED_D_SEL1: J35.2 R47.P6
ZED_D_SEL2: J54.2 R73.P6
ZED_D_SEL_LV: R3.P3 U3.47
ZED_D_SEL_LV1: R47.P3 U9.47
ZED_D_SEL_LV2: R73.P3 U20.47
ZED_EXTINT: R9.P7 U1.5
ZED_EXTINT1: R48.P7 U16.5
ZED_EXTINT2: R74.P7 U25.5
ZED_FENCE_STAT: J1.2 R4.P5
ZED_FENCE_STAT1: J29.2 R45.P5
ZED_FENCE_STAT2: J48.2 R71.P5
ZED_PPS_STAT: J6.5 R9.P8 U1.14
ZED_PPS_STAT1: J35.5 R48.P8 U16.14
ZED_PPS_STAT2: J54.5 R74.P8 U25.14
ZED_RTK_STAT: J1.3 R4.P6
ZED_RTK_STAT1: J29.3 R45.P6
ZED_RTK_STAT2: J48.3 R71.P6

## Tracks (layer width: path | path; a pad name or v marks a point on that pad's centre or on a via)
3.3V  (via drill 0.3)
  Top 0.305: v36.52,74.12 36.52,71.31 36.46,71.25 36.46,70.7 36.57,70.58 U1.16 34.07,69.77 C3.1 30.87,69.82 30.01,68.97 C28.1 | C28.1 | 27.77,64.41 27.77,64.31 27.17,63.72 C19.1 27.17,61.68 v27.1,61.61 | 27.77,64.41 U13.2 | U13.9 27.77,67.84 | 27.77,67.84 27.77,67.87 C28.1 | U13.10 27.27,67.75 27.36,67.84 27.77,67.84 | U13.3 28.27,64.6 28.07,64.41 27.77,64.41
  Top 0.559: U3.38 37.17,49.55 37.74,50.12 C7.2 R15.2 41.04,50.12 | J1.4 60.83,44.38 62.06,43.15 62.06,35.95 60.07,33.95 J12.4 | J12.4 60.07,21.38 62,19.45 J2.1 62,15.82 v61.97,15.79 | C16.1 59.9,29.97 J12.4 | U3.33 42.67,49.47 C2.1 41.62,50.12 | 41.62,50.12 41.04,50.12 | U3.34 41.57,50.07 41.62,50.12 | J17.2 11.52,59.93 J13.2 11.52,50.24 13.23,48.53 24.53,48.53 v27.34,51.34 30.12,54.12 C5.2 C4.1 38.12,54.02 U2.5 40.27,54.02 v41.02,53.27 v41.01,53.27 41.01,50.15 41.04,50.12
  Route2 0.559: v25.78,89.34 25.91,89.22 58.8,89.22 v59.05,89.47 | v60.09,51.71 42.57,51.71 v41.01,53.27
  Route15 0.559: J1.4 60.07,51.69 v60.09,51.71
  Bottom 0.305: C13.1 C14.1 24.17,105.47 24.12,105.42 | U6.16 24.12,105.42 | 24.12,105.42 24.88,105.42 25.78,104.51 25.78,103.06 | v27.34,51.34 27.34,54.42 27.06,54.7 27.06,55.25 27.1,55.29 v27.1,61.61
  Bottom 0.559: 25.78,101.61 v25.78,89.34 25.78,75.76 27.42,74.12 v36.52,74.12 39.1,74.12 41.01,72.22 v41.01,53.27 | 25.78,103.06 25.78,101.61 | U6.4 25.78,101.61 | v59.05,89.47 59.01,89.51 59.01,104.28 | J4.2 41.52,16.18 41.91,15.79 61.47,15.79 | 61.47,15.79 v61.97,15.79 | J16.VCC 61.54,15.87 61.47,15.79 | 59.01,104.28 59.01,111.84 58.03,112.82 C10.1 C11.1 51.08,112.82 50.77,113.13 U5.2 | 59.01,104.28 53.87,104.28 | R13.2 53.87,104.28 | 53.87,104.28 52.41,104.28 52.02,104.67 R20.2
3.3V1  (via drill 0.3)
  Top 0.305: v105.23,74.12 105.23,71.31 105.17,71.25 105.17,70.7 105.28,70.58 U16.16 102.78,69.77 C42.1 99.57,69.82 98.72,68.97 C46.1 | C46.1 | 96.48,64.41 96.48,64.31 95.88,63.72 C47.1 95.88,61.68 v95.81,61.61 | 96.48,64.41 U17.2 | U17.9 96.48,67.84 | 96.48,67.84 96.48,67.87 C46.1 | U17.10 95.98,67.75 96.06,67.84 96.48,67.84 | U17.3 96.98,64.6 96.78,64.41 96.48,64.41
  Top 0.559: U9.38 105.88,49.55 106.45,50.12 C30.2 R11.2 109.75,50.12 | J29.4 129.54,44.38 130.77,43.15 130.77,35.95 128.78,33.95 J28.4 | J28.4 128.78,21.38 130.71,19.45 J26.1 130.71,15.82 v130.68,15.79 | C38.1 128.61,29.97 J28.4 | U9.33 111.38,49.47 C29.1 110.33,50.12 | 110.33,50.12 109.75,50.12 | U9.34 110.28,50.07 110.33,50.12 | J33.2 80.23,59.93 J34.2 80.23,50.24 81.93,48.53 93.24,48.53 v96.05,51.34 98.83,54.12 C25.2 C24.1 106.83,54.02 U8.5 108.98,54.02 v109.73,53.27 v109.72,53.27 109.72,50.15 109.75,50.12
  Route2 0.559: v94.49,89.34 94.61,89.22 127.51,89.22 v127.76,89.47 | v128.8,51.71 111.28,51.71 v109.72,53.27
  Route15 0.559: J29.4 128.78,51.69 v128.8,51.71
  Bottom 0.305: C36.1 C37.1 92.88,105.47 92.83,105.42 | U11.16 92.83,105.42 | 92.83,105.42 93.58,105.42 94.49,104.51 94.49,103.06 | v96.05,51.34 96.05,54.42 95.77,54.7 95.77,55.25 95.81,55.29 v95.81,61.61
  Bottom 0.559: 94.49,101.61 v94.49,89.34 94.49,75.76 96.13,74.12 v105.23,74.12 107.81,74.12 109.72,72.22 v109.72,53.27 | 94.49,103.06 94.49,101.61 | U11.4 94.49,101.61 | v127.76,89.47 127.72,89.51 127.72,104.28 | J19.2 110.23,16.18 110.62,15.79 130.17,15.79 | 130.17,15.79 v130.68,15.79 | J31.VCC 130.25,15.87 130.17,15.79 | 127.72,104.28 127.72,111.84 126.74,112.82 C33.1 C34.1 119.78,112.82 119.47,113.13 U18.2 | 127.72,104.28 122.58,104.28 | R39.2 122.58,104.28 | 122.58,104.28 121.12,104.28 120.73,104.67 R32.2
3.3V2  (via drill 0.3)
  Top 0.305: v173.94,74.12 173.94,71.31 173.87,71.25 173.87,70.7 173.99,70.58 U25.16 171.48,69.77 C66.1 168.28,69.82 167.43,68.97 C70.1 | C70.1 | 165.18,64.41 165.18,64.31 164.58,63.72 C71.1 164.58,61.68 v164.52,61.61 | 165.18,64.41 U26.2 | U26.9 165.18,67.84 | 165.18,67.84 165.18,67.87 C70.1 | U26.10 164.68,67.75 164.77,67.84 165.18,67.84 | U26.3 165.68,64.6 165.49,64.41 165.18,64.41
  Top 0.559: U20.38 174.58,49.55 175.16,50.12 C54.2 R56.2 178.45,50.12 | J48.4 198.25,44.38 199.48,43.15 199.48,35.95 197.48,33.95 J47.4 | J47.4 197.48,21.38 199.42,19.45 J45.1 199.42,15.82 v199.39,15.79 | C62.1 197.31,29.97 J47.4 | U20.33 180.08,49.47 C53.1 179.03,50.12 | 179.03,50.12 178.45,50.12 | U20.34 178.98,50.07 179.03,50.12 | J52.2 148.93,59.93 J53.2 148.93,50.24 150.64,48.53 161.94,48.53 v164.75,51.34 167.53,54.12 C50.2 C49.1 175.53,54.02 U19.5 177.68,54.02 v178.43,53.27 178.43,50.15 178.45,50.12
  Route2 0.559: v163.19,89.34 163.32,89.22 196.21,89.22 v196.47,89.47 | v197.5,51.71 179.99,51.71 v178.43,53.27
  Route15 0.559: J48.4 197.48,51.69 v197.5,51.71
  Bottom 0.305: C60.1 C61.1 161.58,105.47 161.53,105.42 | U21.16 161.53,105.42 | 161.53,105.42 162.29,105.42 163.19,104.51 163.19,103.06 | v164.75,51.34 164.75,54.42 164.47,54.7 164.47,55.25 164.52,55.29 v164.52,61.61
  Bottom 0.559: 163.19,101.61 v163.19,89.34 163.19,75.76 164.83,74.12 v173.94,74.12 176.52,74.12 178.43,72.22 v178.43,53.27 | 163.19,103.06 163.19,101.61 | U21.4 163.19,101.61 | v196.47,89.47 196.43,89.51 196.43,104.28 | J39.2 178.93,16.18 179.32,15.79 198.88,15.79 | 198.88,15.79 v199.39,15.79 | J50.VCC 198.96,15.87 198.88,15.79 | 196.43,104.28 196.43,111.84 195.44,112.82 C57.1 C58.1 188.49,112.82 188.18,113.13 U27.2 | 196.43,104.28 191.28,104.28 | R65.2 191.28,104.28 | 191.28,104.28 189.82,104.28 189.43,104.67 R60.2
ANT_VCC
  Top 0.351: FB1.2 37.16,29.2 C1.1 38.97,29.14 R14.1
ANT_VCC1
  Top 0.351: FB2.2 105.86,29.2 C27.1 107.68,29.14 R10.1
ANT_VCC2
  Top 0.351: FB3.2 174.57,29.2 C52.1 176.39,29.14 R55.1
CC1
  Top 0.178: J5.A5 39.77,22 38.79,22.97 R17.2
CC2
  Top 0.178: J5.B5 42.77,22.15 43.6,22.97 R16.2
CC3
  Top 0.178: J3.B5 54.2,21.61 54.2,22 R37.2
CC4
  Top 0.178: J3.A5 51.2,22 50.22,22.97 R38.2
CC5
  Top 0.178: J21.A5 108.48,22 107.5,22.97 R21.2
CC6
  Top 0.178: J21.B5 111.48,22.15 112.3,22.97 R12.2
CC7
  Top 0.178: J24.B5 122.91,21.61 122.91,22 R35.2
CC8
  Top 0.178: J24.A5 119.91,22 118.93,22.97 R36.2
CC9
  Top 0.178: J40.A5 177.18,22 176.21,22.97 R58.2
CC10
  Top 0.178: J40.B5 180.18,22.15 181.01,22.97 R57.2
CC11
  Top 0.178: J43.B5 191.61,21.61 191.61,22 R63.2
CC12